# EAGLE board RGB_Station_v11_pannel (EAGLE 7.7.0), part 1 of 2
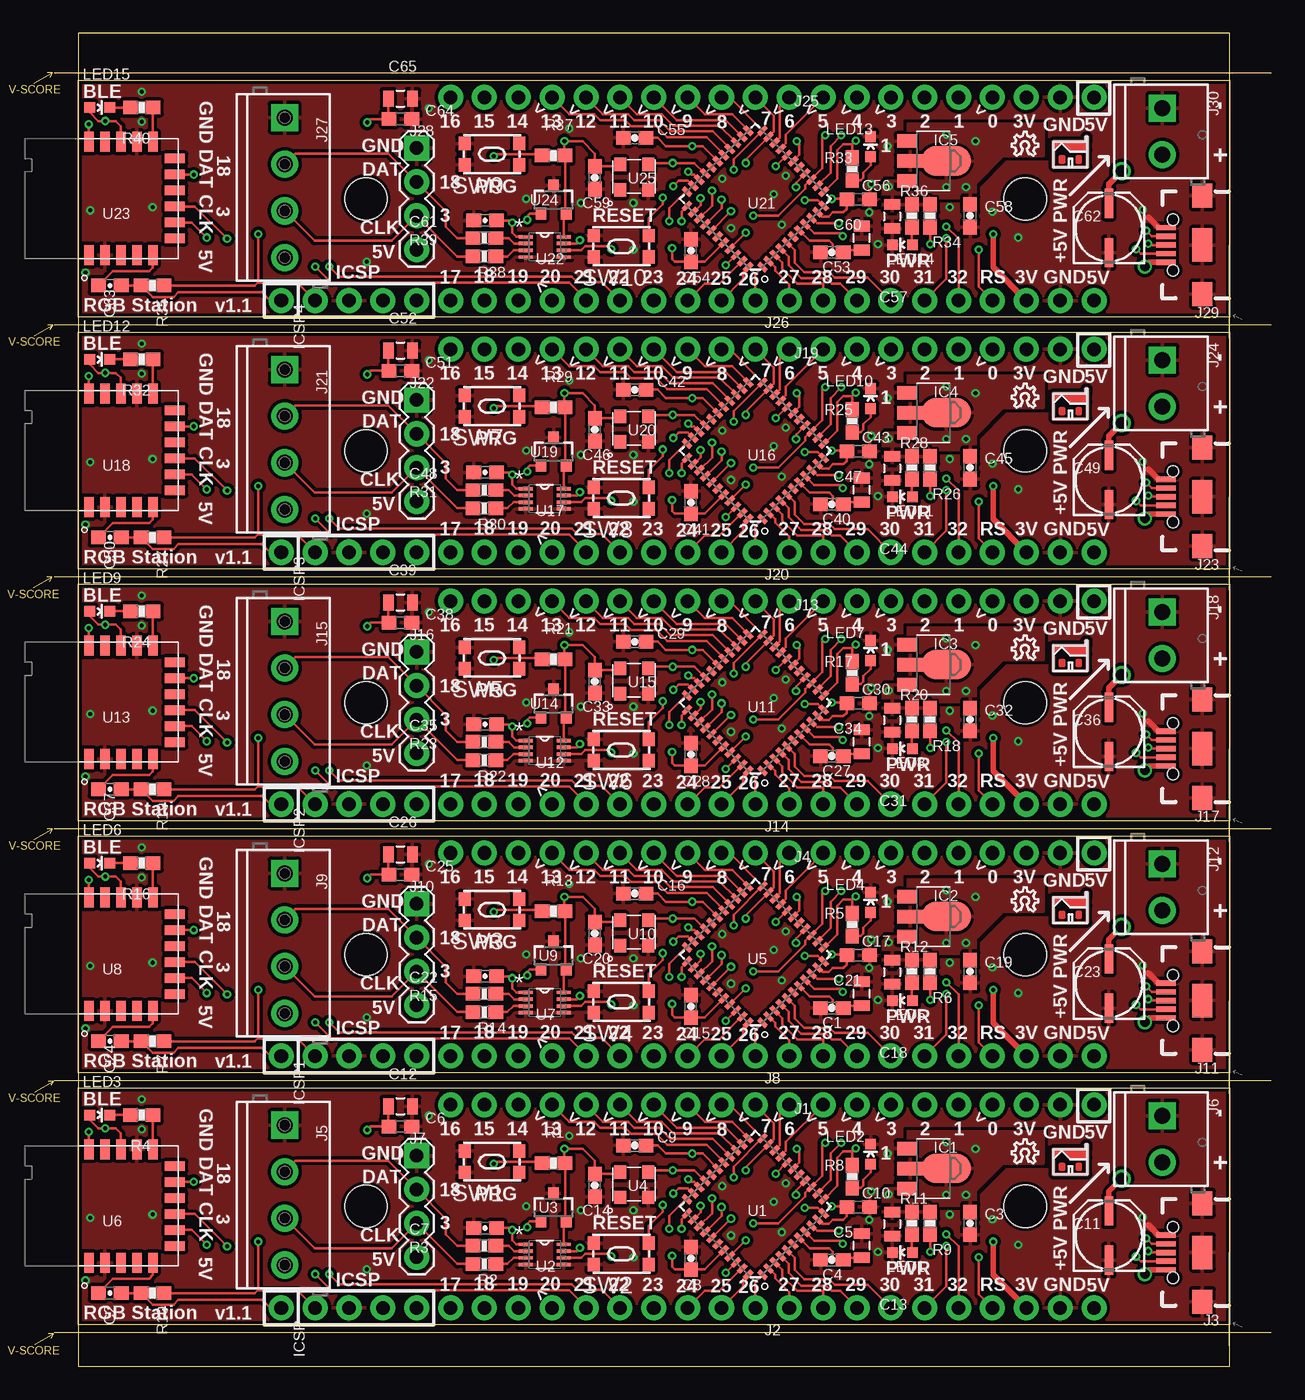
[diagram p0: board, top side]
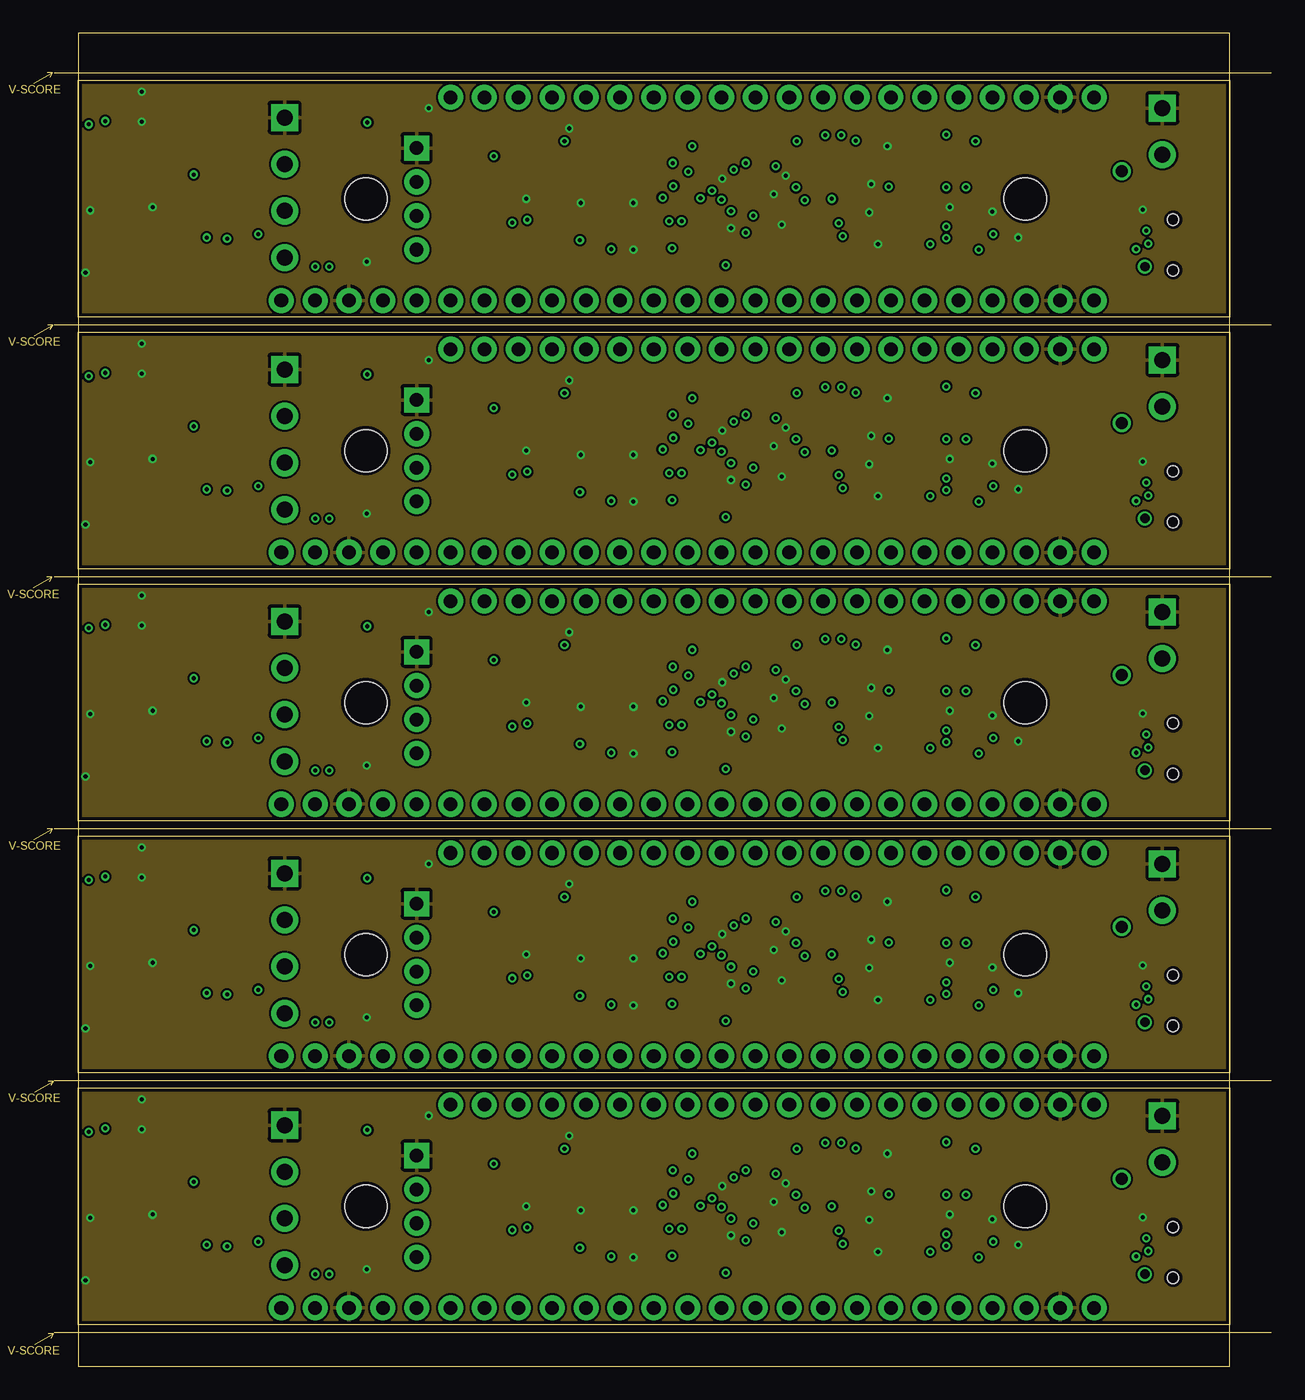
[diagram p1: board, inner layer Route2]
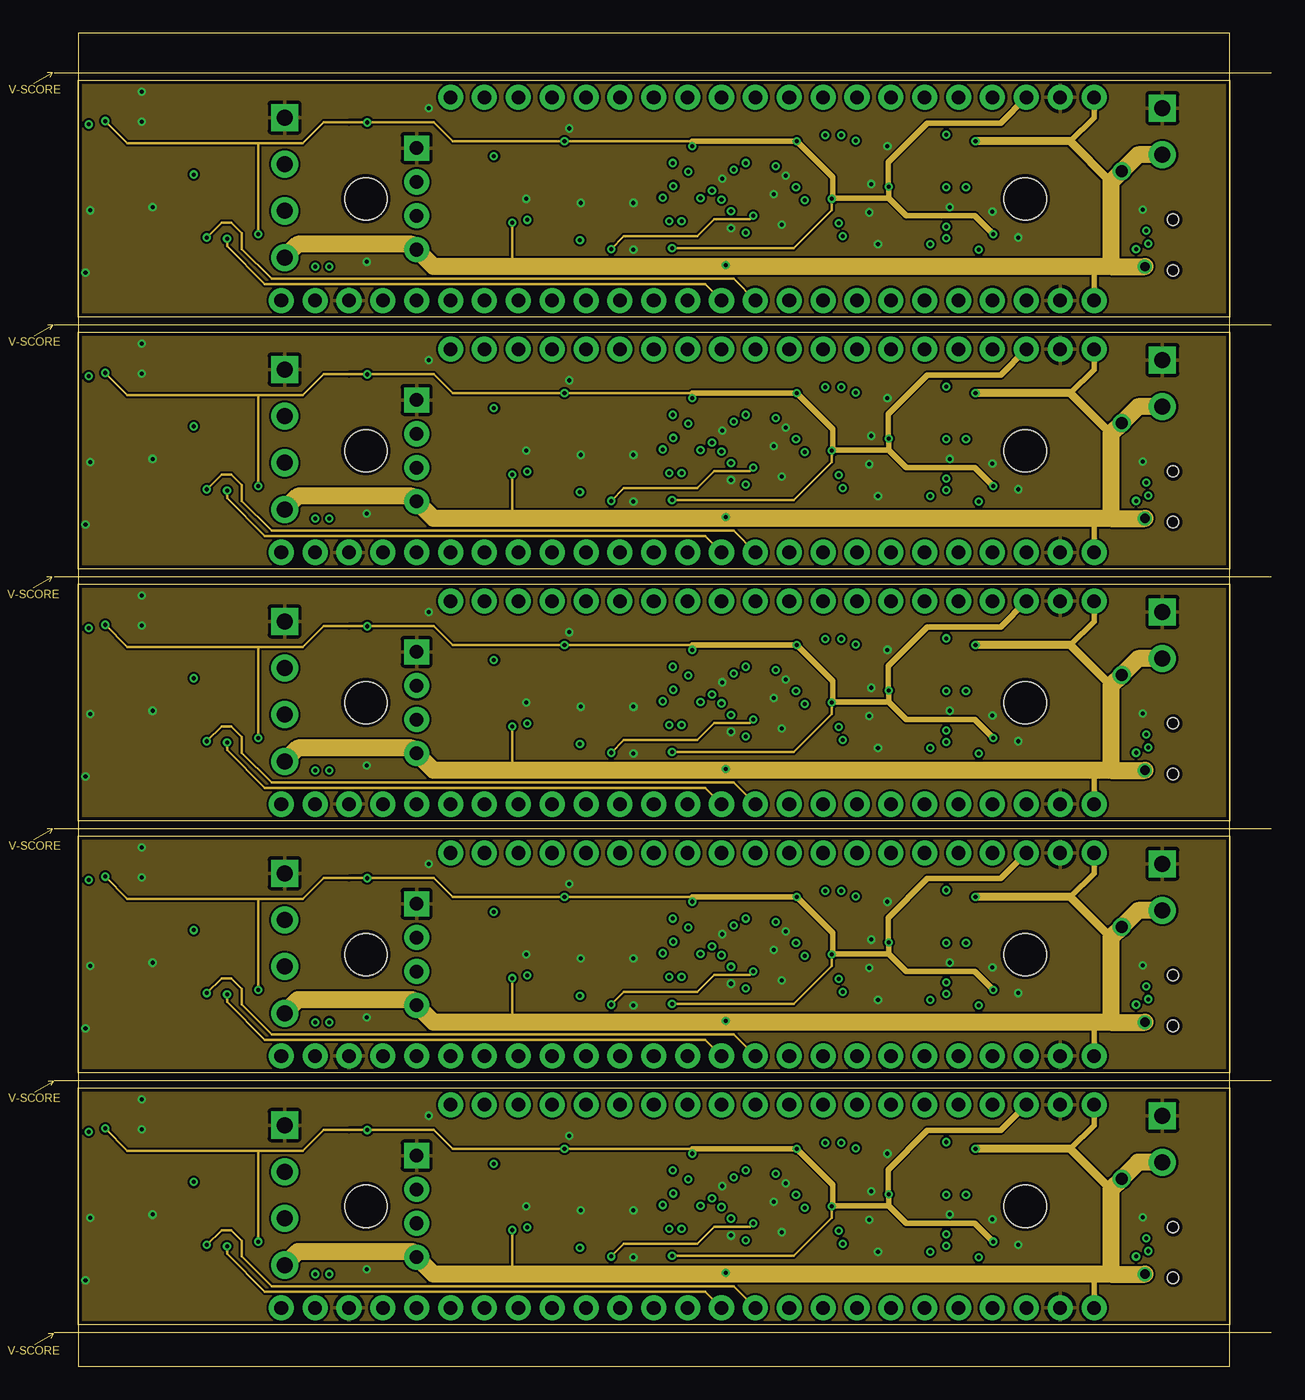
[diagram p2: board, inner layer Route15]
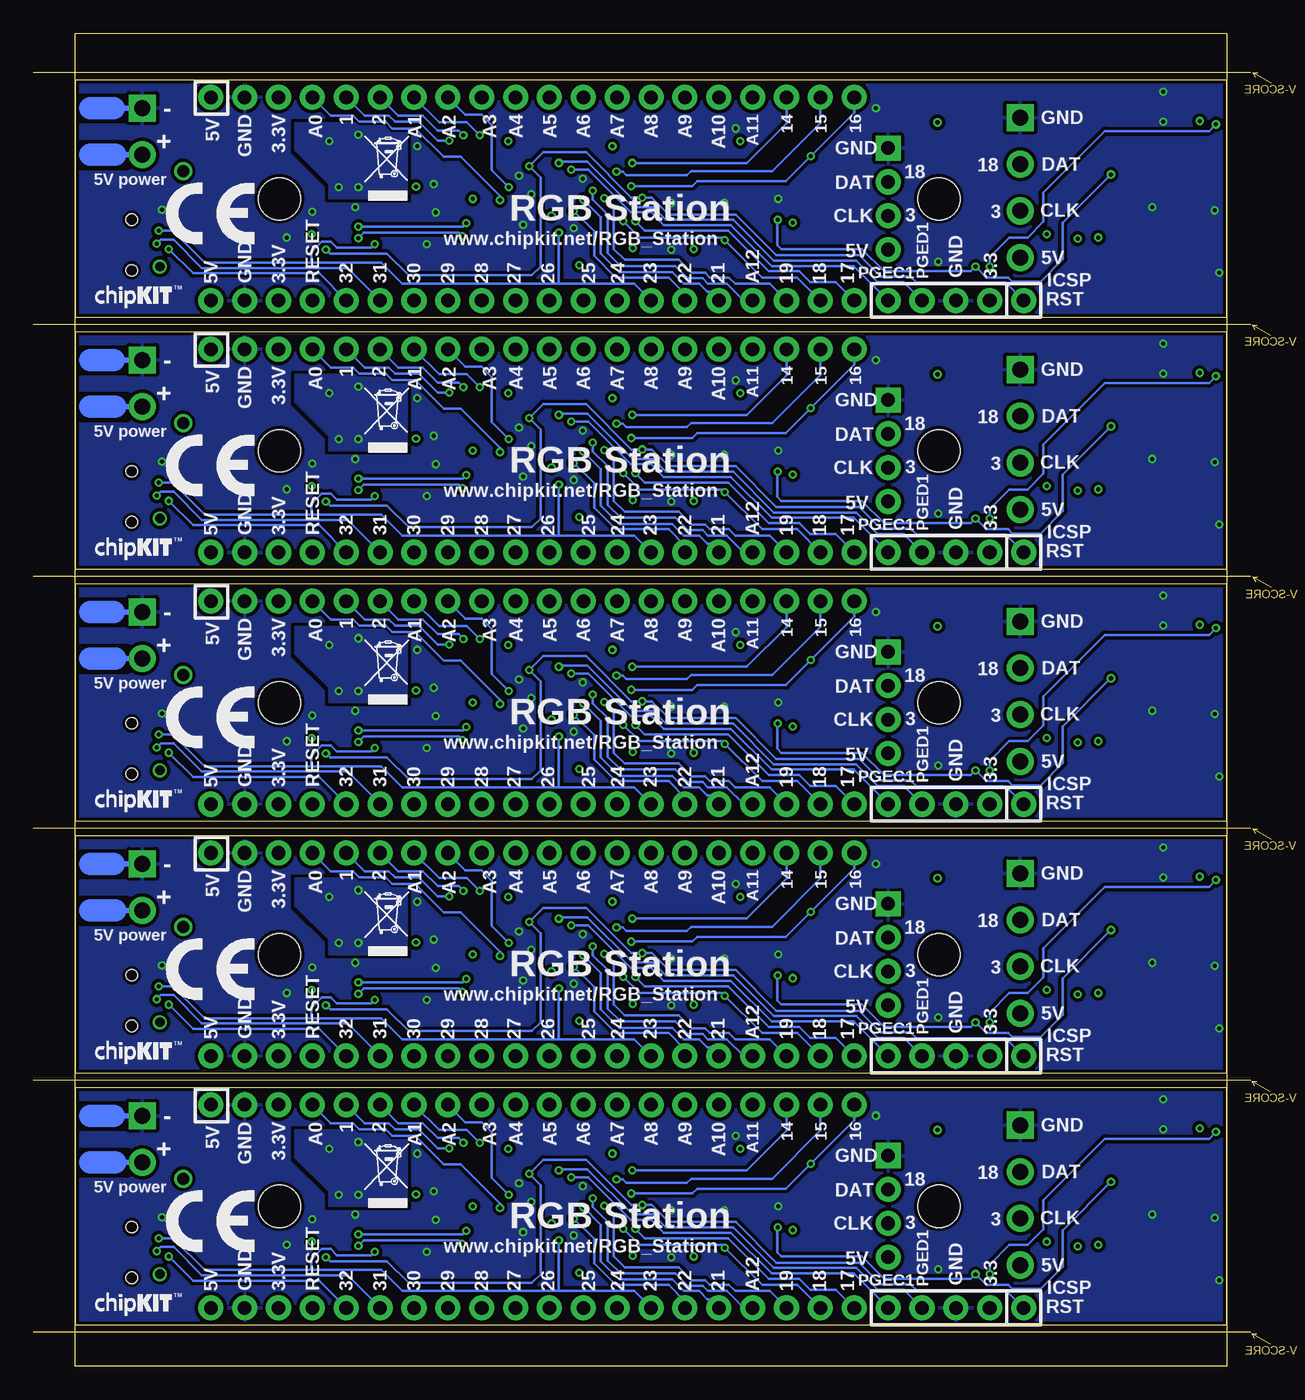
[diagram p3: board, bottom side, seen from below]

Size 92.86 x 100 mm. Coordinates in mm from the lower left corner, seen from the top.
Outline: 1.57,21.44 92.86,21.44
Outline: 1.57,40.34 92.86,40.34
Outline: 1.57,59.23 92.86,59.23
Outline: 1.57,78.13 92.86,78.13
Outline: 1.57,97.03 92.86,97.03
Outline: 1.57,2.54 92.86,2.54
Outline: 0.03,96.24 1.42,97.03
Outline: 1.42,97.03 1.04,97.03
Outline: 1.42,97.03 1.22,96.7
Outline: 0.05,77.32 1.45,78.11
Outline: 1.45,78.11 1.07,78.11
Outline: 1.45,78.11 1.24,77.78
Outline: 0,58.42 1.4,59.21
Outline: 1.4,59.21 1.02,59.21
Outline: 1.4,59.21 1.19,58.88
Outline: 0.03,39.52 1.42,40.31
Outline: 1.42,40.31 1.04,40.31
Outline: 1.42,40.31 1.22,39.98
Outline: 0.1,20.6 1.5,21.39
Outline: 1.5,21.39 1.12,21.39
Outline: 1.5,21.39 1.3,21.06
Outline: 0.1,1.63 1.5,2.41
Outline: 1.5,2.41 1.12,2.41
Outline: 1.5,2.41 1.3,2.08
Outline: 3.35,20.88 89.71,20.88 89.71,3.1 3.35,3.1 3.35,20.88
Outline: 3.35,0 89.71,0 89.71,100 3.35,100 3.35,0
Outline: 3.35,39.78 89.71,39.78 89.71,22 3.35,22 3.35,39.78
Outline: 3.35,58.67 89.71,58.67 89.71,40.89 3.35,40.89 3.35,58.67
Outline: 3.35,77.57 89.71,77.57 89.71,59.79 3.35,59.79 3.35,77.57
Outline: 3.35,96.47 89.71,96.47 89.71,78.69 3.35,78.69 3.35,96.47
Copper layers (1*2*15*16): Top 0.035mm / dielectric 1.5mm / Route2 0.035mm / dielectric 0.15mm / Route15 0.035mm / dielectric 0.2mm / Bottom 0.035mm
Design rules "Fusion_eagle_rule_v1.1 *": minimum track width 6mil, minimum drill 12mil, track to track 6mil, track to pad 6mil, pad to pad 6mil, via to via 6mil, smd to smd 0mil, copper to edge 10mil, drill to drill 10mil, minimum pad ring 10mil, minimum via ring 6mil, stop-mask expansion 2mil, vias tented up to drill 100mil, thermal gap 10mil
Holes 3.17 mm at 24.94,11.99 74.4,11.99 24.94,30.89 74.4,30.89 24.94,49.78 74.4,49.78 24.94,68.68 74.4,68.68 24.94,87.58 74.4,87.58
bRestrict: area 85.8,14.4 to 89.8,16.2; area 85.9,17.9 to 89.8,19.7; area 85.8,33.3 to 89.8,35.1; area 85.9,36.8 to 89.8,38.6; area 85.8,52.2 to 89.8,53.9; area 85.9,55.7 to 89.8,57.5; area 85.8,71.1 to 89.8,72.8; area 85.9,74.6 to 89.8,76.4; area 85.8,90 to 89.8,91.7; area 85.9,93.5 to 89.8,95.2

## Footprints (pad centres in the part's own frame; a part is rotated, then mirrored left to right if it is on the bottom)
0603-CAP = smd 1.1 x 1: 1 -0.85,0; 2 0.85,0
0805 = smd 0.8 x 1.2: 1 -0.9,0; 2 0.9,0
0603 = smd 1.1 x 1: 1 -0.85,0; 2 0.85,0
PANASONIC_C = smd 2.2 x 0.65: + 1.9,-0.2; - -1.8,-0.2
SOT89 = smd 1 x 1.5: 1 -1.499,-1.981; 3 1.499,-1.981 | smd 1 x 2: 2 0,-1.727 | smd 2.2 x 3.7: 2@1 0,0.94
1X05_NOSILK = drill 1.016 pad 1.88: 1 0,0; 2 2.54,0; 3 5.08,0; 4 7.62,0; 5 10.16,0
1X20_NO_PIN1 = drill 1.016 pad 1.88: 1 -24.13,0; 2 -21.59,0; 3 -19.05,0; 4 -16.51,0; 5 -13.97,0; 6 -11.43,0; 7 -8.89,0; 8 -6.35,0; 9 -3.81,0; 10 -1.27,0; 11 1.27,0; 12 3.81,0; 13 6.35,0; 14 8.89,0; 15 11.43,0; 16 13.97,0; 17 16.51,0; 18 19.05,0; 19 21.59,0; 20 24.13,0
USB-B-MICRO-SMD = smd 1.45 x 0.4: D+ 2.725,0; D- 2.725,0.65; GND 2.725,-1.3; ID 2.725,-0.65; VBUS 2.725,1.3 | smd 1.5 x 1.8: SHIELD1 0,3.685; SHIELD2 0,-3.685 | smd 1.5 x 2.5: SHIELD3 0,0 | hole 0.85: 2.2,1.9; 2.2,-1.9
SCREWTERMINAL-3.5MM-4@1 = drill 1.2 pad 2.032 square: 1 0,0 | drill 1.2 pad 2.032: 2 3.5,0; 3 7,0; 4 10.5,0
SCREWTERMINAL-3.5MM-2 = drill 1.2 pad 2.032 square: 1 0,0 | drill 1.2 pad 2.032: 2 3.5,0
1X04 = drill 1.016 pad 1.88 square: 1 0,0 | drill 1.016 pad 1.88: 2 2.54,0; 3 5.08,0; 4 7.62,0
LED-0603 = smd 0.8 x 0.8: A 0,-0.75; C 0,0.75
0603-RES = smd 1.1 x 1: 1 -0.85,0; 2 0.85,0
KMR2_SWITCH = smd 0.9 x 1: P1 -2.05,0.8; P2 -2.05,-0.8; P3 2.05,-0.8; P4 2.05,0.8
QFN-44-8X8-NOPAD = smd 0.8 x 0.35: 1 -4,3.25; 2 -4,2.6; 3 -4,1.95; 4 -4,1.3; 5 -4,0.65; 6 -4,0; 7 -4,-0.65; 8 -4,-1.3; 9 -4,-1.95; 10 -4,-2.6; 11 -4,-3.25; 23 4,-3.25; 24 4,-2.6; 25 4,-1.95; 26 4,-1.3; 27 4,-0.65; 28 4,0; 29 4,0.65; 30 4,1.3; 31 4,1.95; 32 4,2.6; 33 4,3.25 | smd 0.35 x 0.8: 12 -3.25,-4; 13 -2.6,-4; 14 -1.95,-4; 15 -1.3,-4; 16 -0.65,-4; 17 0,-4; 18 0.65,-4; 19 1.3,-4; 20 1.95,-4; 21 2.6,-4; 22 3.25,-4; 34 3.25,4; 35 2.6,4; 36 1.95,4; 37 1.3,4; 38 0.65,4; 39 0,4; 40 -0.65,4; 41 -1.3,4; 42 -1.95,4; 43 -2.6,4; 44 -3.25,4
VSSOP8 = smd 1.067 x 0.254: 1 -1.422,0.762; 2 -1.422,0.254; 3 -1.422,-0.254; 4 -1.422,-0.762; 5 1.422,-0.762; 6 1.422,-0.254; 7 1.422,0.254; 8 1.422,0.762
SOT23-3 = smd 0.8 x 0.9: 1 -0.95,-1; 2 0.95,-1; 3 0,1.1
CDFN-4_3.2X2.5 = smd 1 x 0.9: P1 -0.95,1.05; P2 -0.95,-1.05; P3 0.95,-1.05; P4 0.95,1.05
RN4871 = smd 1.5 x 0.7: 1 0.25,6.7; 2 0.25,5.5; 3 0.25,4.3; 4 0.25,3.1; 5 0.25,1.9; 12 8.75,1.9; 13 8.75,3.1; 14 8.75,4.3; 15 8.75,5.5; 16 8.75,6.7 | smd 0.7 x 1.5: 6 1.5,0.25; 7 2.7,0.25; 8 3.9,0.25; 9 5.1,0.25; 10 6.3,0.25; 11 7.5,0.25

## Placement (x,y rotation side)
C1  0.1uF  [0603-CAP]  59.89,26.87 180 top
C2  .1uF  [0603-CAP]  5.74,5.49 0 top
C3  1uF  [0603-CAP]  70.26,10.72 270 top
C4  0.1uF  [0603-CAP]  59.89,7.98 180 top
C5  10uF  [0805]  62.13,9.04 90 top
C6  0.1uF  [0603]  27.53,17.98 0 top
C7  .1uF  [0603-CAP]  33.88,10.36 0 top
C8  0.1uF  [0603-CAP]  49.32,8.1 90 top
C9  0.1uF  [0603-CAP]  45.11,16.56 180 top
C10  0.1uF  [0603]  61.87,11.94 0 top
C11  100uF  [PANASONIC_C]  80.47,9.75 90 top
C12  10uF  [0805]  27.53,19.51 0 top
C13  10uF  [0805]  64.41,10.67 270 top
C14  .1uF  [0603-CAP]  42.11,13.56 90 top
C15  0.1uF  [0603-CAP]  49.32,27 90 top
C16  0.1uF  [0603-CAP]  45.11,35.46 180 top
C17  0.1uF  [0603]  61.87,30.84 0 top
C18  10uF  [0805]  64.41,29.57 270 top
C19  1uF  [0603-CAP]  70.26,29.62 270 top
C20  .1uF  [0603-CAP]  42.11,32.46 90 top
C21  10uF  [0805]  62.13,27.94 90 top
C22  .1uF  [0603-CAP]  33.88,29.26 0 top
C23  100uF  [PANASONIC_C]  80.47,28.65 90 top
C24  .1uF  [0603-CAP]  5.74,24.38 0 top
C25  0.1uF  [0603]  27.53,36.88 0 top
C26  10uF  [0805]  27.53,38.4 0 top
C27  0.1uF  [0603-CAP]  59.89,45.77 180 top
C28  0.1uF  [0603-CAP]  49.32,45.89 90 top
C29  0.1uF  [0603-CAP]  45.11,54.36 180 top
C30  0.1uF  [0603]  61.87,49.73 0 top
C31  10uF  [0805]  64.41,48.46 270 top
C32  1uF  [0603-CAP]  70.26,48.51 270 top
C33  .1uF  [0603-CAP]  42.11,51.36 90 top
C34  10uF  [0805]  62.13,46.84 90 top
C35  .1uF  [0603-CAP]  33.88,48.16 0 top
C36  100uF  [PANASONIC_C]  80.47,47.55 90 top
C37  .1uF  [0603-CAP]  5.74,43.28 0 top
C38  0.1uF  [0603]  27.53,55.78 0 top
C39  10uF  [0805]  27.53,57.3 0 top
C40  0.1uF  [0603-CAP]  59.89,64.67 180 top
C41  0.1uF  [0603-CAP]  49.32,64.79 90 top
C42  0.1uF  [0603-CAP]  45.11,73.25 180 top
C43  0.1uF  [0603]  61.87,68.63 0 top
C44  10uF  [0805]  64.41,67.36 270 top
C45  1uF  [0603-CAP]  70.26,67.41 270 top
C46  .1uF  [0603-CAP]  42.11,70.26 90 top
C47  10uF  [0805]  62.13,65.74 90 top
C48  .1uF  [0603-CAP]  33.88,67.06 0 top
C49  100uF  [PANASONIC_C]  80.47,66.45 90 top
C50  .1uF  [0603-CAP]  5.74,62.18 0 top
C51  0.1uF  [0603]  27.53,74.68 0 top
C52  10uF  [0805]  27.53,76.2 0 top
C53  0.1uF  [0603-CAP]  59.89,83.57 180 top
C54  0.1uF  [0603-CAP]  49.32,83.69 90 top
C55  0.1uF  [0603-CAP]  45.11,92.15 180 top
C56  0.1uF  [0603]  61.87,87.53 0 top
C57  10uF  [0805]  64.41,86.26 270 top
C58  1uF  [0603-CAP]  70.26,86.31 270 top
C59  .1uF  [0603-CAP]  42.11,89.15 90 top
C60  10uF  [0805]  62.13,84.63 90 top
C61  .1uF  [0603-CAP]  33.88,85.95 0 top
C62  100uF  [PANASONIC_C]  80.47,85.34 90 top
C63  .1uF  [0603-CAP]  5.74,81.08 0 top
C64  0.1uF  [0603]  27.53,93.57 0 top
C65  10uF  [0805]  27.53,95.1 0 top
IC1  MCP1702T-3302E/MB  [SOT89]  67.51,14.83 270 top
IC2  MCP1702T-3302E/MB  [SOT89]  67.51,33.73 270 top
IC3  MCP1702T-3302E/MB  [SOT89]  67.51,52.63 270 top
IC4  MCP1702T-3302E/MB  [SOT89]  67.51,71.53 270 top
IC5  MCP1702T-3302E/MB  [SOT89]  67.51,90.42 270 top
ICSP  J3  [1X05_NOSILK]  18.59,4.37 0 top
ICSP1  J3  [1X05_NOSILK]  18.59,23.27 0 top
ICSP2  J3  [1X05_NOSILK]  18.59,42.16 0 top
ICSP3  J3  [1X05_NOSILK]  18.59,61.06 0 top
ICSP4  J3  [1X05_NOSILK]  18.59,79.96 0 top
J1  M20  [1X20_NO_PIN1]  55.42,19.61 180 top
J2  M20  [1X20_NO_PIN1]  55.42,4.37 0 top
J3  USB_MICRO  [USB-B-MICRO-SMD]  87.68,8.53 180 top
J4  M20  [1X20_NO_PIN1]  55.42,38.51 180 top
J5  [SCREWTERMINAL-3.5MM-4@1]  18.85,18.08 270 top
J6  [SCREWTERMINAL-3.5MM-2]  84.68,18.8 270 top
J7  [1X04]  28.75,15.8 270 top
J8  M20  [1X20_NO_PIN1]  55.42,23.27 0 top
J9  [SCREWTERMINAL-3.5MM-4@1]  18.85,36.98 270 top
J10  [1X04]  28.75,34.7 270 top
J11  USB_MICRO  [USB-B-MICRO-SMD]  87.68,27.43 180 top
J12  [SCREWTERMINAL-3.5MM-2]  84.68,37.69 270 top
J13  M20  [1X20_NO_PIN1]  55.42,57.4 180 top
J14  M20  [1X20_NO_PIN1]  55.42,42.16 0 top
J15  [SCREWTERMINAL-3.5MM-4@1]  18.85,55.88 270 top
J16  [1X04]  28.75,53.59 270 top
J17  USB_MICRO  [USB-B-MICRO-SMD]  87.68,46.33 180 top
J18  [SCREWTERMINAL-3.5MM-2]  84.68,56.59 270 top
J19  M20  [1X20_NO_PIN1]  55.42,76.3 180 top
J20  M20  [1X20_NO_PIN1]  55.42,61.06 0 top
J21  [SCREWTERMINAL-3.5MM-4@1]  18.85,74.78 270 top
J22  [1X04]  28.75,72.49 270 top
J23  USB_MICRO  [USB-B-MICRO-SMD]  87.68,65.23 180 top
J24  [SCREWTERMINAL-3.5MM-2]  84.68,75.49 270 top
J25  M20  [1X20_NO_PIN1]  55.42,95.2 180 top
J26  M20  [1X20_NO_PIN1]  55.42,79.96 0 top
J27  [SCREWTERMINAL-3.5MM-4@1]  18.85,93.68 270 top
J28  [1X04]  28.75,91.39 270 top
J29  USB_MICRO  [USB-B-MICRO-SMD]  87.68,84.12 180 top
J30  [SCREWTERMINAL-3.5MM-2]  84.68,94.39 270 top
LED1  RED  [LED-0603]  65.18,8.53 90 top
LED2  GREEN  [LED-0603]  62.79,15.9 0 top
LED3  Blue  [LED-0603]  4.98,18.85 270 top
LED4  GREEN  [LED-0603]  62.79,34.8 0 top
LED5  RED  [LED-0603]  65.18,27.43 90 top
LED6  Blue  [LED-0603]  4.98,37.74 270 top
LED7  GREEN  [LED-0603]  62.79,53.7 0 top
LED8  RED  [LED-0603]  65.18,46.33 90 top
LED9  Blue  [LED-0603]  4.98,56.64 270 top
LED10  GREEN  [LED-0603]  62.79,72.59 0 top
LED11  RED  [LED-0603]  65.18,65.23 90 top
LED12  Blue  [LED-0603]  4.98,75.54 270 top
LED13  GREEN  [LED-0603]  62.79,91.49 0 top
LED14  RED  [LED-0603]  65.18,84.12 90 top
LED15  Blue  [LED-0603]  4.98,94.44 270 top
LOGO1  OSHW_LOGO_8MILX0070-NT  [OSHW_8X70_NOTEXT]  73.38,15.23 0 top
LOGO2  OSHW_LOGO_8MILX0070-NT  [OSHW_8X70_NOTEXT]  73.38,34.13 0 top
LOGO3  OSHW_LOGO_8MILX0070-NT  [OSHW_8X70_NOTEXT]  73.38,53.03 0 top
LOGO4  OSHW_LOGO_8MILX0070-NT  [OSHW_8X70_NOTEXT]  73.38,71.93 0 top
LOGO5  OSHW_LOGO_8MILX0070-NT  [OSHW_8X70_NOTEXT]  73.38,90.82 0 top
R1  10K  [0603-RES]  39.01,15.24 180 top
R2  100  [0603-RES]  33.83,7.67 180 top
R3  100  [0603-RES]  33.83,9.04 0 top
R4  8.2K  [0603-RES]  8.13,18.85 0 top
R5  8.2K  [0603-RES]  61.42,33.12 270 top
R6  10K  [0603-RES]  67.26,29.62 90 top
R7  10K  [0603-RES]  8.94,24.38 180 top
R8  8.2K  [0603-RES]  61.42,14.22 270 top
R9  10K  [0603-RES]  67.26,10.72 90 top
R10  10K  [0603-RES]  8.94,5.49 180 top
R11  8.2K  [0603-RES]  65.89,10.72 90 top
R12  8.2K  [0603-RES]  65.89,29.62 90 top
R13  10K  [0603-RES]  39.01,34.14 180 top
R14  100  [0603-RES]  33.83,26.57 180 top
R15  100  [0603-RES]  33.83,27.94 0 top
R16  8.2K  [0603-RES]  8.13,37.74 0 top
R17  8.2K  [0603-RES]  61.42,52.02 270 top
R18  10K  [0603-RES]  67.26,48.51 90 top
R19  10K  [0603-RES]  8.94,43.28 180 top
R20  8.2K  [0603-RES]  65.89,48.51 90 top
R21  10K  [0603-RES]  39.01,53.04 180 top
R22  100  [0603-RES]  33.83,45.47 180 top
R23  100  [0603-RES]  33.83,46.84 0 top
R24  8.2K  [0603-RES]  8.13,56.64 0 top
R25  8.2K  [0603-RES]  61.42,70.92 270 top
R26  10K  [0603-RES]  67.26,67.41 90 top
R27  10K  [0603-RES]  8.94,62.18 180 top
R28  8.2K  [0603-RES]  65.89,67.41 90 top
R29  10K  [0603-RES]  39.01,71.93 180 top
R30  100  [0603-RES]  33.83,64.36 180 top
R31  100  [0603-RES]  33.83,65.74 0 top
R32  8.2K  [0603-RES]  8.13,75.54 0 top
R33  8.2K  [0603-RES]  61.42,89.81 270 top
R34  10K  [0603-RES]  67.26,86.31 90 top
R35  10K  [0603-RES]  8.94,81.08 180 top
R36  8.2K  [0603-RES]  65.89,86.31 90 top
R37  10K  [0603-RES]  39.01,90.83 180 top
R38  100  [0603-RES]  33.83,83.26 180 top
R39  100  [0603-RES]  33.83,84.63 0 top
R40  8.2K  [0603-RES]  8.13,94.44 0 top
SW1  KMR2_SWITCH  [KMR2_SWITCH]  34.39,15.34 0 top
SW2  KMR2_SWITCH  [KMR2_SWITCH]  44.09,8.43 0 top
SW3  KMR2_SWITCH  [KMR2_SWITCH]  34.39,34.24 0 top
SW4  KMR2_SWITCH  [KMR2_SWITCH]  44.09,27.33 0 top
SW5  KMR2_SWITCH  [KMR2_SWITCH]  34.39,53.14 0 top
SW6  KMR2_SWITCH  [KMR2_SWITCH]  44.09,46.23 0 top
SW7  KMR2_SWITCH  [KMR2_SWITCH]  34.39,72.03 0 top
SW8  KMR2_SWITCH  [KMR2_SWITCH]  44.09,65.13 0 top
SW9  KMR2_SWITCH  [KMR2_SWITCH]  34.39,90.93 0 top
SW10  KMR2_SWITCH  [KMR2_SWITCH]  44.09,84.02 0 top
U1  PIC32MX270F256D_44VTLA_44  [QFN-44-8X8-NOPAD]  54.15,11.99 135 top
U2  74LVC2T45  [VSSOP8]  38.35,8.38 0 top
U3  MCP121T-315E/TT  [SOT23-3]  39.01,11.89 0 top
U4  DSC6111CI1A-008.0000  [CDFN-4_3.2X2.5]  45.06,13.61 90 top
U5  PIC32MX270F256D_44VTLA_44  [QFN-44-8X8-NOPAD]  54.15,30.89 135 top
U6  RN4871  [RN4871]  10.87,7.52 90 top
U7  74LVC2T45  [VSSOP8]  38.35,27.28 0 top
U8  RN4871  [RN4871]  10.87,26.42 90 top
U9  MCP121T-315E/TT  [SOT23-3]  39.01,30.78 0 top
U10  DSC6111CI1A-008.0000  [CDFN-4_3.2X2.5]  45.06,32.51 90 top
U11  PIC32MX270F256D_44VTLA_44  [QFN-44-8X8-NOPAD]  54.15,49.78 135 top
U12  74LVC2T45  [VSSOP8]  38.35,46.18 0 top
U13  RN4871  [RN4871]  10.87,45.31 90 top
U14  MCP121T-315E/TT  [SOT23-3]  39.01,49.68 0 top
U15  DSC6111CI1A-008.0000  [CDFN-4_3.2X2.5]  45.06,51.41 90 top
U16  PIC32MX270F256D_44VTLA_44  [QFN-44-8X8-NOPAD]  54.15,68.68 135 top
U17  74LVC2T45  [VSSOP8]  38.35,65.07 0 top
U18  RN4871  [RN4871]  10.87,64.21 90 top
U19  MCP121T-315E/TT  [SOT23-3]  39.01,68.58 0 top
U20  DSC6111CI1A-008.0000  [CDFN-4_3.2X2.5]  45.06,70.31 90 top
U21  PIC32MX270F256D_44VTLA_44  [QFN-44-8X8-NOPAD]  54.15,87.58 135 top
U22  74LVC2T45  [VSSOP8]  38.35,83.97 0 top
U23  RN4871  [RN4871]  10.87,83.11 90 top
U24  MCP121T-315E/TT  [SOT23-3]  39.01,87.48 0 top
U25  DSC6111CI1A-008.0000  [CDFN-4_3.2X2.5]  45.06,89.2 90 top
U$1  CE_MARK5MM  [CE_5MM]  79.58,29.83 0 bottom
U$2  CE_MARK5MM  [CE_5MM]  79.58,10.93 0 bottom
U$3  ROSH_GARBAGE  [ROHS_GARBAGE_5MM]  68.02,11.88 0 bottom
U$4  CHIPKIT2MM  [CHIPKIT_2MM]  88.34,3.74 0 bottom
U$5  SCHMALZHAUSSCHMALZHAUS_SMALL  [SCHMALZHAUS_SMALL]  77.77,14.38 0 top
U$6  ROSH_GARBAGE  [ROHS_GARBAGE_5MM]  68.02,30.77 0 bottom
U$7  CHIPKIT2MM  [CHIPKIT_2MM]  88.34,22.64 0 bottom
U$8  SCHMALZHAUSSCHMALZHAUS_SMALL  [SCHMALZHAUS_SMALL]  77.77,33.27 0 top
U$9  CE_MARK5MM  [CE_5MM]  79.58,48.73 0 bottom
U$10  ROSH_GARBAGE  [ROHS_GARBAGE_5MM]  68.02,49.67 0 bottom
U$11  CHIPKIT2MM  [CHIPKIT_2MM]  88.34,41.54 0 bottom
U$12  SCHMALZHAUSSCHMALZHAUS_SMALL  [SCHMALZHAUS_SMALL]  77.77,52.17 0 top
U$13  CE_MARK5MM  [CE_5MM]  79.58,67.62 0 bottom
U$14  ROSH_GARBAGE  [ROHS_GARBAGE_5MM]  68.02,68.57 0 bottom
U$15  CHIPKIT2MM  [CHIPKIT_2MM]  88.34,60.44 0 bottom
U$16  SCHMALZHAUSSCHMALZHAUS_SMALL  [SCHMALZHAUS_SMALL]  77.77,71.07 0 top
U$17  CE_MARK5MM  [CE_5MM]  79.58,86.52 0 bottom
U$18  ROSH_GARBAGE  [ROHS_GARBAGE_5MM]  68.02,87.47 0 bottom
U$19  CHIPKIT2MM  [CHIPKIT_2MM]  88.34,79.33 0 bottom
U$20  SCHMALZHAUSSCHMALZHAUS_SMALL  [SCHMALZHAUS_SMALL]  77.77,89.97 0 top

## Library data of the parts
C1 C3 C4 C8 C9 C14-C16 C19 C20 C27-C29 C32 C33 C40-C42 C45 C46 C53-C55 C58 C59 LED1-LED15 R1 R4-R13 R16-R21 R24-R29 R32-R37 R40 = SparkFun
C2 C7 C11 C22-C24 C35-C37 C48-C50 C61-C63 = SparkFun-Capacitors
C5 C12 C21 C26 C34 C39 C47 C52 C60 C65 ICSP ICSP1-ICSP4 J1 J2 J4 J8 J13 J14 J19 J20 J25 J26 U1 U5 U11 U16 U21 U$5 U$8 U$12 U$16 U$20 = SchmalzHaus
C6 C10 C13 C17 C18 C25 C30 C31 C38 C43 C44 C51 C56 C57 C64 = SparkFun02-20-08
IC1-IC5 = linear
J3 J11 J17 J23 J29 = SparkFun-Connectors; PROD_ID: CONN-11752
J5 J9 J15 J21 J27 = SparkFun-Connectors; PROD_ID: 2xCONN-08399; SF_ID: 2xPRT-08084
J6 J12 J18 J24 J30 = SparkFun-Connectors; PROD_ID: CONN-08399
J7 J10 J16 J22 J28 = SparkFun-Connectors; PROD_ID: CONN-09696
LOGO1-LOGO5 = OSHW
R2 R3 R14 R15 R22 R23 R30 R31 R38 R39 = SparkFun-Resistors
SW1-SW10 = kmr2_switch
U2 U7 U12 U17 U22 = 74LVCH2T45DC
U3 U9 U14 U19 U24 = MCP1x2_ResetController
U4 U10 U15 U20 U25 = DSC61XX
U6 U8 U13 U18 U23 = RN4870-71
U$1-U$4 U$6 U$7 U$9-U$11 U$13-U$15 U$17-U$19 = SchmalzHausPublic

## Nets
3.3V: C6.1 C8.1 C9.1 C10.1 C12.1 C13.1 C14.2 IC1.3 ICSP.2 J1.3 J2.18 LED3.A R1.1 R9.2 R10.1 R11.2 U1.10 U1.17 U1.28 U1.40 U2.8 U3.2 U4.P4 U6.14
3.3V1: C15.1 C16.1 C17.1 C18.1 C20.2 C25.1 C26.1 IC2.3 ICSP1.2 J4.3 J8.18 LED6.A R6.2 R7.1 R12.2 R13.1 U5.10 U5.17 U5.28 U5.40 U7.8 U8.14 U9.2 U10.P4
3.3V2: C28.1 C29.1 C30.1 C31.1 C33.2 C38.1 C39.1 IC3.3 ICSP2.2 J13.3 J14.18 LED9.A R18.2 R19.1 R20.2 R21.1 U11.10 U11.17 U11.28 U11.40 U12.8 U13.14 U14.2 U15.P4
3.3V3: C41.1 C42.1 C43.1 C44.1 C46.2 C51.1 C52.1 IC4.3 ICSP3.2 J19.3 J20.18 LED12.A R26.2 R27.1 R28.2 R29.1 U16.10 U16.17 U16.28 U16.40 U17.8 U18.14 U19.2 U20.P4
3.3V4: C54.1 C55.1 C56.1 C57.1 C59.2 C64.1 C65.1 IC5.3 ICSP4.2 J25.3 J26.18 LED15.A R34.2 R35.1 R36.2 R37.1 U21.10 U21.17 U21.28 U21.40 U22.8 U23.14 U24.2 U25.P4
5V: C3.1 C7.2 C11.+ IC1.2 IC1.2@1 J1.1 J2.20 J3.VBUS J5.4 J6.2 J7.4 U1.42 U2.1
5V1: C19.1 C22.2 C23.+ IC2.2 IC2.2@1 J4.1 J8.20 J9.4 J10.4 J11.VBUS J12.2 U5.42 U7.1
5V2: C32.1 C35.2 C36.+ IC3.2 IC3.2@1 J13.1 J14.20 J15.4 J16.4 J17.VBUS J18.2 U11.42 U12.1
5V3: C45.1 C48.2 C49.+ IC4.2 IC4.2@1 J19.1 J20.20 J21.4 J22.4 J23.VBUS J24.2 U16.42 U17.1
5V4: C58.1 C61.2 C62.+ IC5.2 IC5.2@1 J25.1 J26.20 J27.4 J28.4 J29.VBUS J30.2 U21.42 U22.1
!MCLR!: C2.2 ICSP.1 J2.17 R10.2 SW2.P3 SW2.P4 U1.18
!MCLR!1: C24.2 ICSP1.1 J8.17 R7.2 SW4.P3 SW4.P4 U5.18
!MCLR!2: C37.2 ICSP2.1 J14.17 R19.2 SW6.P3 SW6.P4 U11.18
!MCLR!3: C50.2 ICSP3.1 J20.17 R27.2 SW8.P3 SW8.P4 U16.18
!MCLR!4: C63.2 ICSP4.1 J26.17 R35.2 SW10.P3 SW10.P4 U21.18
BT_MODE: J2.5 U1.37 U6.16
BT_MODE1: J8.5 U5.37 U8.16
BT_MODE2: J14.5 U11.37 U13.16
BT_MODE3: J20.5 U16.37 U18.16
BT_MODE4: J26.5 U21.37 U23.16
BT_RX: J2.10 U1.1 U6.7
BT_RX1: J8.10 U5.1 U8.7
BT_RX2: J14.10 U11.1 U13.7
BT_RX3: J20.10 U16.1 U18.7
BT_RX4: J26.10 U21.1 U23.7
BT_TX: J2.9 U1.44 U6.8
BT_TX1: J8.9 U5.44 U8.8
BT_TX2: J14.9 U11.44 U13.8
BT_TX3: J20.9 U16.44 U18.8
BT_TX4: J26.9 U21.44 U23.8
D+/RB1: J8.15 J11.D+ U5.8
D+/RB2: J14.15 J17.D+ U11.8
D+/RB3: J20.15 J23.D+ U16.8
D+/RB4: J26.15 J29.D+ U21.8
D+/RB10: J2.15 J3.D+ U1.8
D-/RB1: J8.16 J11.D- U5.9
D-/RB2: J14.16 J17.D- U11.9
D-/RB3: J20.16 J23.D- U16.9
D-/RB4: J26.16 J29.D- U21.9
D-/RB11: J2.16 J3.D- U1.9
GND: C3.2 C4.2 C5.2 C6.2 C7.1 C8.2 C9.2 C10.2 C11.- C12.2 C13.2 C14.1 IC1.1 ICSP.3 J1.2 J2.19 J3.GND J3.SHIELD1 J3.SHIELD2 J3.SHIELD3 J5.1 J6.1 J7.1 LED1.C LED2.C SW1.P1 SW1.P2 SW2.P1 SW2.P2 U1.6 U1.16 U1.29 U1.39 U2.4 U2.5 U3.3 U4.P2 U6.2 U6.13
GND1: C1.2 C15.2 C16.2 C17.2 C18.2 C19.2 C20.1 C21.2 C22.1 C23.- C25.2 C26.2 IC2.1 ICSP1.3 J4.2 J8.19 J9.1 J10.1 J11.GND J11.SHIELD1 J11.SHIELD2 J11.SHIELD3 J12.1 LED4.C LED5.C SW3.P1 SW3.P2 SW4.P1 SW4.P2 U5.6 U5.16 U5.29 U5.39 U7.4 U7.5 U8.2 U8.13 U9.3 U10.P2
GND2: C27.2 C28.2 C29.2 C30.2 C31.2 C32.2 C33.1 C34.2 C35.1 C36.- C38.2 C39.2 IC3.1 ICSP2.3 J13.2 J14.19 J15.1 J16.1 J17.GND J17.SHIELD1 J17.SHIELD2 J17.SHIELD3 J18.1 LED7.C LED8.C SW5.P1 SW5.P2 SW6.P1 SW6.P2 U11.6 U11.16 U11.29 U11.39 U12.4 U12.5 U13.2 U13.13 U14.3 U15.P2
GND3: C40.2 C41.2 C42.2 C43.2 C44.2 C45.2 C46.1 C47.2 C48.1 C49.- C51.2 C52.2 IC4.1 ICSP3.3 J19.2 J20.19 J21.1 J22.1 J23.GND J23.SHIELD1 J23.SHIELD2 J23.SHIELD3 J24.1 LED10.C LED11.C SW7.P1 SW7.P2 SW8.P1 SW8.P2 U16.6 U16.16 U16.29 U16.39 U17.4 U17.5 U18.2 U18.13 U19.3 U20.P2
GND4: C53.2 C54.2 C55.2 C56.2 C57.2 C58.2 C59.1 C60.2 C61.1 C62.- C64.2 C65.2 IC5.1 ICSP4.3 J25.2 J26.19 J27.1 J28.1 J29.GND J29.SHIELD1 J29.SHIELD2 J29.SHIELD3 J30.1 LED13.C LED14.C SW9.P1 SW9.P2 SW10.P1 SW10.P2 U21.6 U21.16 U21.29 U21.39 U22.4 U22.5 U23.2 U23.13 U24.3 U25.P2
LED_CLOCK: J1.7 U1.14 U2.6
LED_CLOCK1: J4.7 U5.14 U7.6
LED_CLOCK2: J13.7 U11.14 U12.6
LED_CLOCK3: J19.7 U16.14 U17.6
LED_CLOCK4: J25.7 U21.14 U22.6
LED_DATA: J2.2 U1.34 U2.7
LED_DATA1: J8.2 U5.34 U7.7
LED_DATA2: J14.2 U11.34 U12.7
LED_DATA3: J20.2 U16.34 U17.7
LED_DATA4: J26.2 U21.34 U22.7
N$1: R4.2 U6.12
N$2: J5.2 J7.2 R3.1
N$3: R3.2 U2.2
N$4: J5.3 J7.3 R2.2
N$5: LED3.C R4.1
N$6: LED1.A R11.1
N$7: LED5.A R12.1
N$8: C2.1 U6.5
N$9: J9.3 J10.3 R14.2
N$10: R14.1 U7.3
N$11: LED2.A R8.2
N$12: J9.2 J10.2 R15.1
N$13: R15.2 U7.2
N$14: C24.1 U8.5
N$15: LED4.A R5.2
N$16: R16.2 U8.12
N$17: LED6.C R16.1
N$18: LED8.A R20.1
N$19: J15.3 J16.3 R22.2
N$20: R22.1 U12.3
N$21: J15.2 J16.2 R23.1
N$22: R23.2 U12.2
N$23: R2.1 U2.3
N$24: C37.1 U13.5
N$25: LED7.A R17.2
N$26: R24.2 U13.12
N$27: LED9.C R24.1
N$28: LED11.A R28.1
N$29: J21.3 J22.3 R30.2
N$30: R30.1 U17.3
N$31: J21.2 J22.2 R31.1
N$32: R31.2 U17.2
N$33: C50.1 U18.5
N$34: LED10.A R25.2
N$35: R32.2 U18.12
N$36: LED12.C R32.1
N$37: LED14.A R36.1
N$38: J27.3 J28.3 R38.2
N$39: R38.1 U22.3
N$40: J27.2 J28.2 R39.1
N$41: R39.2 U22.2
N$42: C63.1 U23.5
N$43: LED13.A R33.2
N$44: R40.2 U23.12
N$45: LED15.C R40.1
RA0: J1.9 U1.19
RA1: J1.10 U1.20
RA2: J1.18 U1.30 U4.P3
RA3: J1.19 U1.31
RA4: J4.19 U5.31
RA5: J4.18 U5.30 U10.P3
RA6: J8.3 U5.35
RA7: J1.6 U1.13
RA8: J1.20 R1.2 SW1.P3 SW1.P4 U1.32
RA9: J2.3 U1.35
RA10: J1.5 R8.1 U1.12
RA11: J4.20 R13.2 SW3.P3 SW3.P4 U5.32
RA12: J4.5 R5.1 U5.12
RA13: J4.6 U5.13
RA14: J4.9 U5.19
RA15: J4.10 U5.20
RA16: J13.19 U11.31
RA17: J13.18 U11.30 U15.P3
RA18: J14.3 U11.35
RA19: J13.20 R21.2 SW5.P3 SW5.P4 U11.32
RA20: J13.5 R17.1 U11.12
RA21: J13.6 U11.13
RA22: J13.9 U11.19
RA23: J13.10 U11.20
RA24: J19.19 U16.31
RA25: J19.18 U16.30 U20.P3
RA26: J20.3 U16.35
RA27: J19.20 R29.2 SW7.P3 SW7.P4 U16.32
RA28: J19.5 R25.1 U16.12
RA29: J19.6 U16.13
RA30: J19.9 U16.19
RA31: J19.10 U16.20
RA32: J25.19 U21.31
RA33: J25.18 U21.30 U25.P3
RA34: J26.3 U21.35
RA35: J25.20 R37.2 SW9.P3 SW9.P4 U21.32
RA36: J25.5 R33.1 U21.12
RA37: J25.6 U21.13
RA38: J25.9 U21.19
RA39: J25.10 U21.20
RB0: ICSP.4 J1.11 U1.21
RB1: ICSP.5 J1.12 U1.22
RB2: J1.13 U1.23
RB3: J1.14 U1.24
RB4: J2.1 U1.33
RB5: J4.4 U5.11
RB6: J4.8 U5.15
RB7: J2.8 U1.43
RB8: ICSP1.5 J4.12 U5.22
RB9: ICSP1.4 J4.11 U5.21
RB10: J8.8 U5.43
RB11: J4.14 U5.24
RB12: J4.13 U5.23
RB13: J1.4 U1.11
RB14: J8.1 U5.33
RB15: J1.8 U1.15
RB16: J13.4 U11.11
RB17: J13.8 U11.15
RB18: ICSP2.5 J13.12 U11.22
RB19: ICSP2.4 J13.11 U11.21
RB20: J14.8 U11.43
RB21: J13.14 U11.24
RB22: J13.13 U11.23
RB23: J14.1 U11.33
RB24: J19.4 U16.11
RB25: J19.8 U16.15
RB26: ICSP3.5 J19.12 U16.22
RB27: ICSP3.4 J19.11 U16.21
RB28: J20.8 U16.43
RB29: J19.14 U16.24
RB30: J19.13 U16.23
RB31: J20.1 U16.33
RB32: J25.4 U21.11
RB33: J25.8 U21.15
RB34: ICSP4.5 J25.12 U21.22
RB35: ICSP4.4 J25.11 U21.21
RB36: J26.8 U21.43
RB37: J25.14 U21.24
RB38: J25.13 U21.23
RB39: J26.1 U21.33
RC0: J1.15 U1.25
RC1: J1.16 U1.26
RC2: J1.17 U1.27
RC3: J2.4 U1.36
RC4: J8.4 U5.36
RC5: J4.17 U5.27
RC6: J2.11 U1.2
RC7: J2.12 U1.3
RC8: J2.13 U1.4
RC9: J2.14 U1.5
RC10: J4.16 U5.26
RC11: J4.15 U5.25
RC12: J8.11 U5.2
RC13: J8.12 U5.3
RC14: J8.13 U5.4
RC15: J8.14 U5.5
RC16: J14.4 U11.36
RC17: J13.17 U11.27
RC18: J13.16 U11.26
RC19: J13.15 U11.25
RC20: J14.11 U11.2
RC21: J14.12 U11.3
RC22: J14.13 U11.4
RC23: J14.14 U11.5
RC24: J20.4 U16.36
RC25: J19.17 U16.27
RC26: J19.16 U16.26
RC27: J19.15 U16.25
RC28: J20.11 U16.2
RC29: J20.12 U16.3
RC30: J20.13 U16.4
RC31: J20.14 U16.5
RC32: J26.4 U21.36
RC33: J25.17 U21.27
RC34: J25.16 U21.26
RC35: J25.15 U21.25
RC36: J26.11 U21.2
RC37: J26.12 U21.3
RC38: J26.13 U21.4
RC39: J26.14 U21.5
RST_N: J2.6 U1.38 U3.1 U6.10
RST_N1: J8.6 U5.38 U8.10 U9.1
RST_N2: J14.6 U11.38 U13.10 U14.1
RST_N3: J20.6 U16.38 U18.10 U19.1
RST_N4: J26.6 U21.38 U23.10 U24.1
USBID/RB1: J8.7 J11.ID R6.1 U5.41
USBID/RB2: J14.7 J17.ID R18.1 U11.41
USBID/RB3: J20.7 J23.ID R26.1 U16.41
USBID/RB4: J26.7 J29.ID R34.1 U21.41
USBID/RB5: J2.7 J3.ID R9.1 U1.41
VCAP: C4.1 C5.1 U1.7
VCAP1: C1.1 C21.1 U5.7
VCAP2: C27.1 C34.1 U11.7
VCAP3: C40.1 C47.1 U16.7
VCAP4: C53.1 C60.1 U21.7

## Tracks (layer width: path | path; a pad name or v marks a point on that pad's centre or on a via)
3.3V  (via drill 0.3, 0.33)
  Top 0.178: 58.85,11 59.18,10.67 59.64,10.67 59.94,10.97 60.76,10.97 61.01,11.23 61.01,11.92 C10.1 | U1.28 50.19,15.95 v49.43,15.95 47.45,15.95 46.84,16.56 C9.1 | U1.17 57.45,15.29 57.45,16.1 v57.25,16.31 | U1.40 50.34,7.26 49.33,7.26 | 49.33,7.26 C8.1 | 49.33,7.26 48.11,7.26 47.9,7.47 v47.9,8.28 | ICSP.2 19.81,5.69 16.92,5.69 16.87,5.74 v16.87,9.35 | U2.8 39.78,10.62 39.88,10.62 39.96,10.7 U3.2 39.88,10.97 39.88,15.23 R1.1 39.84,15.27 v39.84,16.31 41.2,16.31 42.11,15.39 C14.2 42.3,14.41 42.32,14.43 43.87,14.43 U4.P4 | U6.14 6.57,17.46 6.2,17.83 v5.38,17.83 4.88,17.83 4.23,18.48 LED3.A
  Top 0.203: U1.10 58.85,11 | U1.40 | v59.89,11.99 60.97,11.99 C10.1 | R10.1 16.61,5.49 16.87,5.74 | C12.1 26.63,18.03 C6.1 25.3,17.98 v25.04,17.73
  Top 0.406: v71.98,9.35 71.98,6.86 J2.18
  Route15 0.178: 49.43,16.31 v39.84,16.31 31.44,16.31 30.02,17.73 v25.04,17.73 | 23.67,17.73 21.79,17.73 20.22,16.15 16.85,16.15 | 16.85,16.15 7.06,16.15 v5.38,17.83 | 16.85,16.15 16.85,9.36 v16.87,9.35 | v47.9,8.28 57.05,8.28 59.89,11.12 v59.89,11.99
  Route15 0.203: v25.04,17.73 23.67,17.73
  Route15 0.406: J1.3 72.54,17.68 67.06,17.68 64.11,14.73 64.11,12.95 v64.16,12.9 64.16,12.04 | 64.16,12.04 65.48,10.72 70.61,10.72 v71.98,9.35 | 64.16,12.04 59.94,12.04 | 59.94,12.04 v59.89,11.99 | 59.94,12.04 59.94,13.61 v57.25,16.31 49.43,16.31 v49.43,15.95
  pour Top: 64.06,13.36 63.7,13 63.7,11.07 67.31,11.07 67.31,12.04 66.95,12.4 66.14,12.4 65.89,12.65 65.89,12.95 65.48,13.36
3.3V1  (via drill 0.3, 0.33)
  Top 0.178: 58.85,29.9 59.18,29.57 59.64,29.57 59.94,29.87 60.76,29.87 61.01,30.12 61.01,30.82 C17.1 | U5.28 50.19,34.85 v49.43,34.85 47.45,34.85 46.84,35.46 C16.1 | U5.17 57.45,34.19 57.45,35 v57.25,35.2 | U5.40 50.34,26.16 49.33,26.16 | 49.33,26.16 C15.1 | 49.33,26.16 48.11,26.16 47.9,26.36 v47.9,27.18 | ICSP1.2 19.81,24.59 16.92,24.59 16.87,24.64 v16.87,28.25 | U7.8 39.78,29.52 39.88,29.52 39.96,29.6 U9.2 39.88,29.87 39.88,34.12 R13.1 39.84,34.17 v39.84,35.2 41.2,35.2 42.11,34.29 C20.2 42.3,33.31 42.32,33.33 43.87,33.33 U10.P4 | U8.14 6.57,36.35 6.2,36.73 v5.38,36.73 4.88,36.73 4.23,37.38 LED6.A
  Top 0.203: U5.10 58.85,29.9 | U5.40 | v59.89,30.89 60.97,30.89 C17.1 | R7.1 16.61,24.38 16.87,24.64 | C26.1 26.63,36.93 C25.1 25.3,36.88 v25.04,36.63
  Top 0.406: v71.98,28.25 71.98,25.76 J8.18
  Route15 0.178: 49.43,35.2 v39.84,35.2 31.44,35.2 30.02,36.63 v25.04,36.63 | 23.67,36.63 21.79,36.63 20.22,35.05 16.85,35.05 | 16.85,35.05 7.06,35.05 v5.38,36.73 | 16.85,35.05 16.85,28.26 v16.87,28.25 | v47.9,27.18 57.05,27.18 59.89,30.02 v59.89,30.89
  Route15 0.203: v25.04,36.63 23.67,36.63
  Route15 0.406: J4.3 72.54,36.58 67.06,36.58 64.11,33.63 64.11,31.85 v64.16,31.8 64.16,30.94 | 64.16,30.94 65.48,29.62 70.61,29.62 v71.98,28.25 | 64.16,30.94 59.94,30.94 | 59.94,30.94 v59.89,30.89 | 59.94,30.94 59.94,32.51 v57.25,35.2 49.43,35.2 v49.43,34.85
  pour Top: 64.06,32.26 63.7,31.9 63.7,29.97 67.31,29.97 67.31,30.94 66.95,31.29 66.14,31.29 65.89,31.55 65.89,31.85 65.48,32.26
3.3V2  (via drill 0.3, 0.33)
  Top 0.178: 58.85,48.79 59.18,48.46 59.64,48.46 59.94,48.77 60.76,48.77 61.01,49.02 61.01,49.72 C30.1 | U11.28 50.19,53.75 v49.43,53.75 47.45,53.75 46.84,54.36 C29.1 | U11.17 57.45,53.09 57.45,53.9 v57.25,54.1 | U11.40 50.34,45.06 49.33,45.06 | 49.33,45.06 C28.1 | 49.33,45.06 48.11,45.06 47.9,45.26 v47.9,46.08 | ICSP2.2 19.81,43.48 16.92,43.48 16.87,43.54 v16.87,47.14 | U12.8 39.78,48.41 39.88,48.41 39.96,48.5 U14.2 39.88,48.77 39.88,53.02 R21.1 39.84,53.06 v39.84,54.1 41.2,54.1 42.11,53.19 C33.2 42.3,52.21 42.32,52.22 43.87,52.22 U15.P4 | U13.14 6.57,55.25 6.2,55.63 v5.38,55.63 4.88,55.63 4.23,56.27 LED9.A
  Top 0.203: U11.10 58.85,48.79 | U11.40 | v59.89,49.78 60.97,49.78 C30.1 | R19.1 16.61,43.28 16.87,43.54 | C39.1 26.63,55.83 C38.1 25.3,55.78 v25.04,55.52
  Top 0.406: v71.98,47.14 71.98,44.65 J14.18
  Route15 0.178: 49.43,54.1 v39.84,54.1 31.44,54.1 30.02,55.52 v25.04,55.52 | 23.67,55.52 21.79,55.52 20.22,53.95 16.85,53.95 | 16.85,53.95 7.06,53.95 v5.38,55.63 | 16.85,53.95 16.85,47.16 v16.87,47.14 | v47.9,46.08 57.05,46.08 59.89,48.92 v59.89,49.78
  Route15 0.203: v25.04,55.52 23.67,55.52
  Route15 0.406: J13.3 72.54,55.47 67.06,55.47 64.11,52.53 64.11,50.75 v64.16,50.7 64.16,49.84 | 64.16,49.84 65.48,48.51 70.61,48.51 v71.98,47.14 | 64.16,49.84 59.94,49.84 | 59.94,49.84 v59.89,49.78 | 59.94,49.84 59.94,51.41 v57.25,54.1 49.43,54.1 v49.43,53.75
  pour Top: 64.06,51.16 63.7,50.8 63.7,48.87 67.31,48.87 67.31,49.83 66.95,50.19 66.14,50.19 65.89,50.44 65.89,50.75 65.48,51.16
3.3V3  (via drill 0.3, 0.33)
  Top 0.178: 58.85,67.69 59.18,67.36 59.64,67.36 59.94,67.67 60.76,67.67 61.01,67.92 61.01,68.62 C43.1 | U16.28 50.19,72.64 v49.43,72.64 47.45,72.64 46.84,73.25 C42.1 | U16.17 57.45,71.98 57.45,72.8 v57.25,73 | U16.40 50.34,63.96 49.33,63.96 | 49.33,63.96 C41.1 | 49.33,63.96 48.11,63.96 47.9,64.16 v47.9,64.97 | ICSP3.2 19.81,62.38 16.92,62.38 16.87,62.43 v16.87,66.04 | U17.8 39.78,67.31 39.88,67.31 39.96,67.4 U19.2 39.88,67.67 39.88,71.92 R29.1 39.84,71.96 v39.84,73 41.2,73 42.11,72.08 C46.2 42.3,71.11 42.32,71.12 43.87,71.12 U20.P4 | U18.14 6.57,74.15 6.2,74.52 v5.38,74.52 4.88,74.52 4.23,75.17 LED12.A
  Top 0.203: U16.10 58.85,67.69 | U16.40 | v59.89,68.68 60.97,68.68 C43.1 | R27.1 16.61,62.18 16.87,62.43 | C52.1 26.63,74.73 C51.1 25.3,74.68 v25.04,74.42
  Top 0.406: v71.98,66.04 71.98,63.55 J20.18
  Route15 0.178: 49.43,73 v39.84,73 31.44,73 30.02,74.42 v25.04,74.42 | 23.67,74.42 21.79,74.42 20.22,72.85 16.85,72.85 | 16.85,72.85 7.06,72.85 v5.38,74.52 | 16.85,72.85 16.85,66.06 v16.87,66.04 | v47.9,64.97 57.05,64.97 59.89,67.82 v59.89,68.68
  Route15 0.203: v25.04,74.42 23.67,74.42
  Route15 0.406: J19.3 72.54,74.37 67.06,74.37 64.11,71.42 64.11,69.65 v64.16,69.6 64.16,68.73 | 64.16,68.73 65.48,67.41 70.61,67.41 v71.98,66.04 | 64.16,68.73 59.94,68.73 | 59.94,68.73 v59.89,68.68 | 59.94,68.73 59.94,70.31 v57.25,73 49.43,73 v49.43,72.64
  pour Top: 64.06,70.05 63.7,69.7 63.7,67.77 67.31,67.77 67.31,68.73 66.95,69.09 66.14,69.09 65.89,69.34 65.89,69.65 65.48,70.05
3.3V4  (via drill 0.3, 0.33)
  Top 0.178: 58.85,86.59 59.18,86.26 59.64,86.26 59.94,86.56 60.76,86.56 61.01,86.82 61.01,87.52 C56.1 | U21.28 50.19,91.54 v49.43,91.54 47.45,91.54 46.84,92.15 C55.1 | U21.17 57.45,90.88 57.45,91.69 v57.25,91.9 | U21.40 50.34,82.86 49.33,82.86 | 49.33,82.86 C54.1 | 49.33,82.86 48.11,82.86 47.9,83.06 v47.9,83.87 | ICSP4.2 19.81,81.28 16.92,81.28 16.87,81.33 v16.87,84.94 | U22.8 39.78,86.21 39.88,86.21 39.96,86.29 U24.2 39.88,86.56 39.88,90.82 R37.1 39.84,90.86 v39.84,91.9 41.2,91.9 42.11,90.98 C59.2 42.3,90 42.32,90.02 43.87,90.02 U25.P4 | U23.14 6.57,93.05 6.2,93.42 v5.38,93.42 4.88,93.42 4.23,94.07 LED15.A
  Top 0.203: U21.10 58.85,86.59 | U21.40 | v59.89,87.58 60.97,87.58 C56.1 | R35.1 16.61,81.08 16.87,81.33 | C65.1 26.63,93.62 C64.1 25.3,93.57 v25.04,93.32
  Top 0.406: v71.98,84.94 71.98,82.45 J26.18
  Route15 0.178: 49.43,91.9 v39.84,91.9 31.44,91.9 30.02,93.32 v25.04,93.32 | 23.67,93.32 21.79,93.32 20.22,91.75 16.85,91.75 | 16.85,91.75 7.06,91.75 v5.38,93.42 | 16.85,91.75 16.85,84.95 v16.87,84.94 | v47.9,83.87 57.05,83.87 59.89,86.72 v59.89,87.58
  Route15 0.203: v25.04,93.32 23.67,93.32
  Route15 0.406: J25.3 72.54,93.27 67.06,93.27 64.11,90.32 64.11,88.54 v64.16,88.49 64.16,87.63 | 64.16,87.63 65.48,86.31 70.61,86.31 v71.98,84.94 | 64.16,87.63 59.94,87.63 | 59.94,87.63 v59.89,87.58 | 59.94,87.63 59.94,89.2 v57.25,91.9 49.43,91.9 v49.43,91.54
  pour Top: 64.06,88.95 63.7,88.6 63.7,86.66 67.31,86.66 67.31,87.63 66.95,87.99 66.14,87.99 65.89,88.24 65.89,88.54 65.48,88.95
5V  (via drill 0.3, 0.7, 0.9)
  Top 0.178: C7.2 35.76,10.36 v35.92,10.21 35.92,9.45 36.22,9.14 U2.1 | 52.7,7.8 v51.92,7.01
  Top 0.203: U1.42 52.7,7.8
  Top 0.406: C11.+ 80.67,13.1 v81.64,14.07 | J3.VBUS 83.69,7.23 v83.36,6.91
  Route15 0.178: v35.92,10.21 35.92,6.96 35.86,6.91 | v51.92,7.01 51.92,6.91
  Route15 0.254: 82.85,15.29 82.86,15.29
  Route15 0.406: 77.77,16.31 79.55,18.09 J1.1 | J2.20 79.55,6.91 | 80.82,13.16 80.82,13.26
  Route15 0.61: 80.82,13.26 77.77,16.31 v70.66,16.31
  Route15 1.27: 80.82,13.16 80.82,6.91 | 80.82,6.91 79.55,6.91 51.92,6.91 35.86,6.91 30.02,6.91 J7.4 28.75,8.23 28.4,8.59 19.85,8.59 J5.4 | 80.82,6.91 v83.36,6.91 | 80.82,13.26 v81.64,14.07 82.85,15.29 82.86,15.3 J6.2
  Bottom 0.406: J6.2 86.72,15.29
  Bottom 1.676: 86.72,15.29 88.59,15.29
  other vias: 69.95,12.85 68.48,16.81 68.48,12.85
  pour Top (rank 3): 65.63,12.04 70.66,12.04 70.66,13.11 72.75,15.19 75.74,15.19 75.79,15.24 75.79,17.63 65.58,17.63
  pour Bottom: 64.87,17.68 64.87,11.99 70.66,12.04 70.66,13.11 73.2,15.65 73.2,17.68
5V1  (via drill 0.3, 0.7, 0.9)
  Top 0.178: C22.2 35.76,29.26 v35.92,29.11 35.92,28.35 36.22,28.04 U7.1 | 52.7,26.69 v51.92,25.91
  Top 0.203: U5.42 52.7,26.69
  Top 0.406: C23.+ 80.67,32 v81.64,32.97 | J11.VBUS 83.69,26.13 v83.36,25.81
  Route15 0.178: v35.92,29.11 35.92,25.86 35.86,25.81 | v51.92,25.91 51.92,25.81
  Route15 0.254: 82.85,34.19 82.86,34.19
  Route15 0.406: 77.77,35.2 79.55,36.98 J4.1 | J8.20 79.55,25.81 | 80.82,32.05 80.82,32.16
  Route15 0.61: 80.82,32.16 77.77,35.2 v70.66,35.2
  Route15 1.27: 80.82,32.05 80.82,25.81 | 80.82,25.81 79.55,25.81 51.92,25.81 35.86,25.81 30.02,25.81 J10.4 28.75,27.13 28.4,27.48 19.85,27.48 J9.4 | 80.82,25.81 v83.36,25.81 | 80.82,32.16 v81.64,32.97 82.85,34.19 82.86,34.19 J12.2
  Bottom 0.406: J12.2 86.72,34.19
  Bottom 1.676: 86.72,34.19 88.59,34.19
  other vias: 69.95,31.75 68.48,35.71 68.48,31.75
  pour Top (rank 3): 65.63,30.94 70.66,30.94 70.66,32 72.75,34.09 75.74,34.09 75.79,34.14 75.79,36.53 65.58,36.53
  pour Bottom: 64.87,36.58 64.87,30.89 70.66,30.94 70.66,32 73.2,34.54 73.2,36.58
5V2  (via drill 0.3, 0.7, 0.9)
  Top 0.178: C35.2 35.76,48.16 v35.92,48.01 35.92,47.24 36.22,46.94 U12.1 | 52.7,45.59 v51.92,44.81
  Top 0.203: U11.42 52.7,45.59
  Top 0.406: C36.+ 80.67,50.9 v81.64,51.87 | J17.VBUS 83.69,45.03 v83.36,44.7
  Route15 0.178: v35.92,48.01 35.92,44.76 35.86,44.7 | v51.92,44.81 51.92,44.7
  Route15 0.254: 82.85,53.09 82.86,53.09
  Route15 0.406: 77.77,54.1 79.55,55.88 J13.1 | J14.20 79.55,44.7 | 80.82,50.95 80.82,51.05
  Route15 0.61: 80.82,51.05 77.77,54.1 v70.66,54.1
  Route15 1.27: 80.82,50.95 80.82,44.7 | 80.82,44.7 79.55,44.7 51.92,44.7 35.86,44.7 30.02,44.7 J16.4 28.75,46.02 28.4,46.38 19.85,46.38 J15.4 | 80.82,44.7 v83.36,44.7 | 80.82,51.05 v81.64,51.87 82.85,53.09 82.86,53.09 J18.2
  Bottom 0.406: J18.2 86.72,53.09
  Bottom 1.676: 86.72,53.09 88.59,53.09
  other vias: 69.95,50.65 68.48,54.61 68.48,50.65
  pour Top (rank 3): 65.63,49.83 70.66,49.83 70.66,50.9 72.75,52.98 75.74,52.98 75.79,53.04 75.79,55.42 65.58,55.42
  pour Bottom: 64.87,55.47 64.87,49.78 70.66,49.83 70.66,50.9 73.2,53.44 73.2,55.47
5V3  (via drill 0.3, 0.7, 0.9)
  Top 0.178: C48.2 35.76,67.06 v35.92,66.9 35.92,66.14 36.22,65.84 U17.1 | 52.7,64.49 v51.92,63.7
  Top 0.203: U16.42 52.7,64.49
  Top 0.406: C49.+ 80.67,69.8 v81.64,70.76 | J23.VBUS 83.69,63.93 v83.36,63.6
  Route15 0.178: v35.92,66.9 35.92,63.65 35.86,63.6 | v51.92,63.7 51.92,63.6
  Route15 0.254: 82.85,71.98 82.86,71.98
  Route15 0.406: 77.77,73 79.55,74.78 J19.1 | J20.20 79.55,63.6 | 80.82,69.85 80.82,69.95
  Route15 0.61: 80.82,69.95 77.77,73 v70.66,73
  Route15 1.27: 80.82,69.85 80.82,63.6 | 80.82,63.6 79.55,63.6 51.92,63.6 35.86,63.6 30.02,63.6 J22.4 28.75,64.92 28.4,65.28 19.85,65.28 J21.4 | 80.82,63.6 v83.36,63.6 | 80.82,69.95 v81.64,70.76 82.85,71.98 82.86,71.99 J24.2
  Bottom 0.406: J24.2 86.72,71.98
  Bottom 1.676: 86.72,71.98 88.59,71.98
  other vias: 69.95,69.55 68.48,73.51 68.48,69.55
  pour Top (rank 3): 65.63,68.73 70.66,68.73 70.66,69.8 72.75,71.88 75.74,71.88 75.79,71.93 75.79,74.32 65.58,74.32
  pour Bottom: 64.87,74.37 64.87,68.68 70.66,68.73 70.66,69.8 73.2,72.34 73.2,74.37
5V4  (via drill 0.3, 0.7, 0.9)
  Top 0.178: C61.2 35.76,85.95 v35.92,85.8 35.92,85.04 36.22,84.73 U22.1 | 52.7,83.39 v51.92,82.6
  Top 0.203: U21.42 52.7,83.39
  Top 0.406: C62.+ 80.67,88.69 v81.64,89.66 | J29.VBUS 83.69,82.83 v83.36,82.5
  Route15 0.178: v35.92,85.8 35.92,82.55 35.86,82.5 | v51.92,82.6 51.92,82.5
  Route15 0.254: 82.85,90.88 82.86,90.88
  Route15 0.406: 77.77,91.9 79.55,93.67 J25.1 | J26.20 79.55,82.5 | 80.82,88.75 80.82,88.85
  Route15 0.61: 80.82,88.85 77.77,91.9 v70.66,91.9
  Route15 1.27: 80.82,88.75 80.82,82.5 | 80.82,82.5 79.55,82.5 51.92,82.5 35.86,82.5 30.02,82.5 J28.4 28.75,83.82 28.4,84.18 19.85,84.18 J27.4 | 80.82,82.5 v83.36,82.5 | 80.82,88.85 v81.64,89.66 82.85,90.88 82.86,90.89 J30.2
  Bottom 0.406: J30.2 86.72,90.88
  Bottom 1.676: 86.72,90.88 88.59,90.88
  other vias: 69.95,88.44 68.48,92.41 68.48,88.44
  pour Top (rank 3): 65.63,87.63 70.66,87.63 70.66,88.7 72.75,90.78 75.74,90.78 75.79,90.83 75.79,93.22 65.58,93.22
  pour Bottom: 64.87,93.27 64.87,87.58 70.66,87.63 70.66,88.7 73.2,91.24 73.2,93.27
!MCLR!  (via drill 0.3)
  Top 0.178: v55.68,14.43 U1.18 | v70.92,8.18 70.92,5.38 J2.17 | v47.19,12.09 47.19,11.58 46.14,10.53 SW2.P4 SW2.P3
  Top 0.203: v55.68,14.43 | C2.2 R10.2 8.95,4.62 10.52,4.62 10.87,4.98 17.17,4.98 17.78,4.37 ICSP.1
  Bottom 0.178: v70.92,8.18 70.61,7.87 66.34,7.87 64.72,6.25 55.47,6.25 54.81,6.91 54.81,13.56 v55.68,14.43 54.61,15.49 51.41,15.49 48.01,12.09 v47.19,12.09 46.48,12.09 45.21,10.82 40.18,10.82 37.13,7.77 30.94,7.77 29.31,6.15 27.08,6.15 26.62,5.69 19.91,5.69 ICSP.1
!MCLR!1  (via drill 0.3)
  Top 0.178: v55.68,33.33 U5.18 | v70.92,27.08 70.92,24.28 J8.17 | v47.19,30.99 47.19,30.48 46.14,29.43 SW4.P4 SW4.P3
  Top 0.203: v55.68,33.33 | C24.2 R7.2 8.95,23.52 10.52,23.52 10.87,23.88 17.17,23.88 17.78,23.27 ICSP1.1
  Bottom 0.178: v70.92,27.08 70.61,26.77 66.34,26.77 64.72,25.15 55.47,25.15 54.81,25.81 54.81,32.46 v55.68,33.33 54.61,34.39 51.41,34.39 48.01,30.99 v47.19,30.99 46.48,30.99 45.21,29.72 40.18,29.72 37.13,26.67 30.94,26.67 29.31,25.04 27.08,25.04 26.62,24.59 19.91,24.59 ICSP1.1
!MCLR!2  (via drill 0.3)
  Top 0.178: v55.68,52.23 U11.18 | v70.92,45.97 70.92,43.18 J14.17 | v47.19,49.89 47.19,49.38 46.14,48.33 SW6.P4 SW6.P3
  Top 0.203: v55.68,52.22 v55.68,52.23 | C37.2 R19.2 8.95,42.42 10.52,42.42 10.87,42.77 17.17,42.77 17.78,42.16 ICSP2.1
  Bottom 0.178: v70.92,45.97 70.61,45.67 66.34,45.67 64.72,44.04 55.47,44.04 54.81,44.7 54.81,51.36 v55.68,52.22 54.61,53.29 51.41,53.29 48.01,49.89 v47.19,49.89 46.48,49.89 45.21,48.62 40.18,48.62 37.13,45.57 30.94,45.57 29.31,43.94 27.08,43.94 26.62,43.48 19.91,43.48 ICSP2.1
!MCLR!3  (via drill 0.3)
  Top 0.178: v55.68,71.12 U16.18 | v70.92,64.87 70.92,62.08 J20.17 | v47.19,68.78 47.19,68.28 46.14,67.23 SW8.P4 SW8.P3
  Top 0.203: v55.68,71.12 | C50.2 R27.2 8.95,61.32 10.52,61.32 10.87,61.67 17.17,61.67 17.78,61.06 ICSP3.1
  Bottom 0.178: v70.92,64.87 70.61,64.57 66.34,64.57 64.72,62.94 55.47,62.94 54.81,63.6 54.81,70.26 v55.68,71.12 54.61,72.19 51.41,72.19 48.01,68.78 v47.19,68.78 46.48,68.78 45.21,67.51 40.18,67.51 37.13,64.47 30.94,64.47 29.31,62.84 27.08,62.84 26.62,62.38 19.91,62.38 ICSP3.1
!MCLR!4  (via drill 0.3)
  Top 0.178: v55.68,90.02 U21.18 | v70.92,83.77 70.92,80.97 J26.17 | v47.19,87.68 47.19,87.17 46.14,86.12 SW10.P4 SW10.P3
  Top 0.203: v55.68,90.02 | C63.2 R35.2 8.95,80.21 10.52,80.21 10.87,80.57 17.17,80.57 17.78,79.96 ICSP4.1
  Bottom 0.178: v70.92,83.77 70.61,83.46 66.34,83.46 64.72,81.84 55.47,81.84 54.81,82.5 54.81,89.15 v55.68,90.02 54.61,91.08 51.41,91.08 48.01,87.68 v47.19,87.68 46.48,87.68 45.21,86.41 40.18,86.41 37.13,83.36 30.94,83.36 29.31,81.74 27.08,81.74 26.62,81.28 19.91,81.28 ICSP4.1
BT_MODE  (via drill 0.3)
  Top 0.178: v51.61,11.94 51.61,11.28 50.41,10.08 | J2.5 41.45,4.42 40.18,5.69 22.35,5.69 v21.13,6.91 | v4.17,17.58 U6.16
  Top 0.203: U1.37 50.41,10.08
  Bottom 0.178: J2.5 42.11,5.03 42.32,5.03 42.93,5.64 44.09,5.64 44.96,6.5 48.92,6.5 50.29,7.87 50.29,10.62 v51.61,11.94 | v21.13,6.91 21.13,7.62 19.66,9.09 18.29,9.09 17.12,10.26 17.12,12.45 12.5,17.07 4.67,17.07 v4.17,17.58
BT_MODE1  (via drill 0.3)
  Top 0.178: v51.61,30.84 51.61,30.18 50.41,28.98 | J8.5 41.45,23.32 40.18,24.59 22.35,24.59 v21.13,25.81 | v4.17,36.47 U8.16
  Top 0.203: U5.37 50.41,28.98
  Bottom 0.178: J8.5 42.11,23.93 42.32,23.93 42.93,24.54 44.09,24.54 44.96,25.4 48.92,25.4 50.29,26.77 50.29,29.52 v51.61,30.84 | v21.13,25.81 21.13,26.52 19.66,27.99 18.29,27.99 17.12,29.16 17.12,31.34 12.5,35.97 4.67,35.97 v4.17,36.47
BT_MODE2  (via drill 0.3)
  Top 0.178: v51.61,49.73 51.61,49.07 50.41,47.88 | J14.5 41.45,42.22 40.18,43.48 22.35,43.48 v21.13,44.7 | v4.17,55.37 U13.16
  Top 0.203: U11.37 50.41,47.88
  Bottom 0.178: J14.5 42.11,42.82 42.32,42.82 42.93,43.43 44.09,43.43 44.96,44.3 48.92,44.3 50.29,45.67 50.29,48.41 v51.61,49.73 | v21.13,44.7 21.13,45.41 19.66,46.89 18.29,46.89 17.12,48.06 17.12,50.24 12.5,54.86 4.67,54.86 v4.17,55.37
BT_MODE3  (via drill 0.3)
  Top 0.178: v51.61,68.63 51.61,67.97 50.41,66.77 | J20.5 41.45,61.11 40.18,62.38 22.35,62.38 v21.13,63.6 | v4.17,74.27 U18.16
  Top 0.203: U16.37 50.41,66.77
  Bottom 0.178: J20.5 42.11,61.72 42.32,61.72 42.93,62.33 44.09,62.33 44.96,63.2 48.92,63.2 50.29,64.57 50.29,67.31 v51.61,68.63 | v21.13,63.6 21.13,64.31 19.66,65.79 18.29,65.79 17.12,66.95 17.12,69.14 12.5,73.76 4.67,73.76 v4.17,74.27
BT_MODE4  (via drill 0.3)
  Top 0.178: v51.61,87.53 51.61,86.87 50.41,85.67 | J26.5 41.45,80.01 40.18,81.28 22.35,81.28 v21.13,82.5 | v4.17,93.17 U23.16
  Top 0.203: U21.37 50.41,85.67
  Bottom 0.178: J26.5 42.11,80.62 42.32,80.62 42.93,81.23 44.09,81.23 44.96,82.09 48.92,82.09 50.29,83.46 50.29,86.21 v51.61,87.53 | v21.13,82.5 21.13,83.21 19.66,84.68 18.29,84.68 17.12,85.85 17.12,88.04 12.5,92.66 4.67,92.66 v4.17,93.17
BT_RX  (via drill 0.3)
  Top 0.178: 54.71,6.85 54.68,6.83 | 54.68,6.83 54.15,6.3 J2.10 | U6.7 11.88,10.22 v13,9.09 | U1.1 54.68,6.83
  Top 0.203: 54.71,6.86 54.71,6.85
  Route15 0.178: J2.10 52.53,5.99 17.88,5.99 15.65,8.23 15.65,9.4 14.83,10.21 14.12,10.21 v13,9.09
BT_RX1  (via drill 0.3)
  Top 0.178: 54.71,25.75 54.68,25.73 | 54.68,25.73 54.15,25.2 J8.10 | U8.7 11.88,29.12 v13,27.99 | U5.1 54.68,25.73
  Top 0.203: 54.71,25.76 54.71,25.75
  Route15 0.178: J8.10 52.53,24.89 17.88,24.89 15.65,27.13 15.65,28.3 14.83,29.11 14.12,29.11 v13,27.99
BT_RX2  (via drill 0.3)
  Top 0.178: 54.71,44.65 54.68,44.62 | 54.68,44.62 54.15,44.09 J14.10 | U13.7 11.88,48.01 v13,46.89 | U11.1 54.68,44.62
  Top 0.203: 54.71,44.66 54.71,44.65
  Route15 0.178: J14.10 52.53,43.79 17.88,43.79 15.65,46.02 15.65,47.19 14.83,48.01 14.12,48.01 v13,46.89
BT_RX3  (via drill 0.3)
  Top 0.178: 54.71,63.55 54.68,63.52 | 54.68,63.52 54.15,62.99 J20.10 | U18.7 11.88,66.91 v13,65.79 | U16.1 54.68,63.52
  Top 0.203: 54.71,63.55
  Route15 0.178: J20.10 52.53,62.69 17.88,62.69 15.65,64.92 15.65,66.09 14.83,66.9 14.12,66.9 v13,65.79
BT_RX4  (via drill 0.3)
  Top 0.178: 54.71,82.44 54.68,82.42 | 54.68,82.42 54.15,81.89 J26.10 | U23.7 11.88,85.81 v13,84.68 | U21.1 54.68,82.42
  Top 0.203: 54.71,82.45 54.71,82.44
  Route15 0.178: J26.10 52.53,81.58 17.88,81.58 15.65,83.82 15.65,84.99 14.83,85.8 14.12,85.8 v13,84.68
BT_TX  (via drill 0.3)
  Top 0.178: 53.51,6.78 53.24,6.5 53.24,5.99 J2.9 | U6.8 12.1,11.42 v14.53,8.99 | 53.62,6.78 U1.44
  Top 0.203: 53.62,6.78 53.51,6.78
  Route15 0.178: J2.9 50.39,5.59 17.37,5.59 14.53,8.43 v14.53,8.99
BT_TX1  (via drill 0.3)
  Top 0.178: 53.51,25.68 53.24,25.4 53.24,24.89 J8.9 | U8.8 12.1,30.32 v14.53,27.89 | 53.62,25.68 U5.44
  Top 0.203: 53.62,25.68 53.51,25.68
  Route15 0.178: J8.9 50.39,24.49 17.37,24.49 14.53,27.33 v14.53,27.89
BT_TX2  (via drill 0.3)
  Top 0.178: 53.51,44.57 53.24,44.3 53.24,43.79 J14.9 | U13.8 12.1,49.21 v14.53,46.79 | 53.62,44.57 U11.44
  Top 0.203: 53.62,44.57 53.51,44.57
  Route15 0.178: J14.9 50.39,43.38 17.37,43.38 14.53,46.23 v14.53,46.79
BT_TX3  (via drill 0.3)
  Top 0.178: 53.51,63.47 53.24,63.2 53.24,62.69 J20.9 | U18.8 12.1,68.11 v14.53,65.68 | 53.62,63.47 U16.44
  Top 0.203: 53.62,63.47 53.51,63.47
  Route15 0.178: J20.9 50.39,62.28 17.37,62.28 14.53,65.13 v14.53,65.68
BT_TX4  (via drill 0.3)
  Top 0.178: 53.51,82.37 53.24,82.09 53.24,81.58 J26.9 | U23.8 12.1,87.01 v14.53,84.58 | 53.62,82.37 U21.44
  Top 0.203: 53.62,82.37 53.51,82.37
  Route15 0.178: J26.9 50.39,81.18 17.37,81.18 14.53,84.02 v14.53,84.58
D+/RB1  (via drill 0.3)
  Top 0.178: 57.9,28.97 58.57,28.3 60.5,28.3 v60.71,28.09 | J11.D+ 83.72,27.43 v83.62,27.53 | v68.48,27.94 68.48,24.89 J8.15
  Top 0.203: U5.8 57.9,28.97
  Bottom 0.178: v60.71,28.09 60.96,28.35 68.07,28.35 v68.48,27.94 | v83.62,27.53 83.31,27.84 82.35,27.84 80.21,25.7 69.29,25.7 J8.15
D+/RB2  (via drill 0.3)
  Top 0.178: U11.8 58.57,47.19 60.5,47.19 v60.71,46.99 | J17.D+ 83.72,46.33 v83.62,46.43 | v68.48,46.84 68.48,43.79 J14.15
  Top 0.203: U11.8
  Bottom 0.178: v60.71,46.99 60.96,47.24 68.07,47.24 v68.48,46.84 | v83.62,46.43 83.31,46.74 82.35,46.74 80.21,44.6 69.29,44.6 J14.15
D+/RB3  (via drill 0.3)
  Top 0.178: U16.8 58.57,66.09 60.5,66.09 v60.71,65.89 | J23.D+ 83.72,65.23 v83.62,65.33 | v68.48,65.73 68.48,62.69 J20.15
  Top 0.203: U16.8
  Bottom 0.178: v60.71,65.89 60.96,66.14 68.07,66.14 v68.48,65.73 | v83.62,65.33 83.31,65.63 82.35,65.63 80.21,63.5 69.29,63.5 J20.15
D+/RB4  (via drill 0.3)
  Top 0.178: U21.8 58.57,84.99 60.5,84.99 v60.71,84.78 | J29.D+ 83.72,84.12 v83.62,84.23 | v68.48,84.63 68.48,81.58 J26.15
  Top 0.203: U21.8
  Bottom 0.178: v60.71,84.78 60.96,85.04 68.07,85.04 v68.48,84.63 | v83.62,84.23 83.31,84.53 82.35,84.53 80.21,82.4 69.29,82.4 J26.15
D+/RB10  (via drill 0.3)
  Top 0.178: U1.8 58.57,9.4 60.5,9.4 v60.71,9.2 | J3.D+ 83.72,8.53 v83.62,8.64 | v68.48,9.04 68.48,5.99 J2.15
  Top 0.203: U1.8
  Bottom 0.178: v60.71,9.2 60.96,9.45 68.07,9.45 v68.48,9.04 | v83.62,8.64 83.31,8.94 82.35,8.94 80.21,6.81 69.29,6.81 J2.15
D-/RB1  (via drill 0.3)
  Top 0.178: 58.4,29.44 58.78,29.06 v60.4,29.06 | J11.D- 83.05,26.78 v82.7,27.13 | v68.48,28.8 69.39,27.89 J8.16
  Top 0.203: U5.9 58.4,29.44
  Bottom 0.178: v60.4,29.06 60.65,28.8 v68.48,28.8 | v82.7,27.13 80.87,25.3 71.42,25.3 J8.16
D-/RB2  (via drill 0.3)
  Top 0.178: 58.4,48.33 58.78,47.95 v60.4,47.95 | J17.D- 83.05,45.68 v82.7,46.02 | v68.48,47.7 69.39,46.79 J14.16
  Top 0.203: U11.9 58.4,48.33
  Bottom 0.178: v60.4,47.95 60.65,47.7 v68.48,47.7 | v82.7,46.02 80.87,44.2 71.42,44.2 J14.16
D-/RB3  (via drill 0.3)
  Top 0.178: 58.4,67.23 58.78,66.85 v60.4,66.85 | J23.D- 83.05,64.58 v82.7,64.92 | v68.48,66.6 69.39,65.68 J20.16
  Top 0.203: U16.9 58.4,67.23
  Bottom 0.178: v60.4,66.85 60.65,66.6 v68.48,66.6 | v82.7,64.92 80.87,63.09 71.42,63.09 J20.16
D-/RB4  (via drill 0.3)
  Top 0.178: 58.4,86.13 58.78,85.75 v60.4,85.75 | J29.D- 83.05,83.47 v82.7,83.82 | v68.48,85.5 69.39,84.58 J26.16
  Top 0.203: U21.9 58.4,86.13
  Bottom 0.178: v60.4,85.75 60.65,85.5 v68.48,85.5 | v82.7,83.82 80.87,81.99 71.42,81.99 J26.16
D-/RB11  (via drill 0.3)
  Top 0.178: 58.4,10.54 58.78,10.16 v60.4,10.16 | J3.D- 83.05,7.88 v82.7,8.23 | v68.48,9.91 69.39,8.99 J2.16
  Top 0.203: U1.9 58.4,10.54
  Bottom 0.178: v60.4,10.16 60.65,9.91 v68.48,9.91 | v82.7,8.23 80.87,6.4 71.42,6.4 J2.16
GND  (via drill 0.3)
  Top 0.178: J3.GND 84.4,9.83
  Top 0.406: 84.4,9.83 83.62,10.62
  Bottom 0.406: J6.1 86.82,18.8
  Bottom 1.676: 86.82,18.8 88.59,18.8
  other vias: 56.13,10.06 56.44,13.72 52.32,9.8 51.66,13.51 62.69,10.97 63.35,8.59 73.86,9.09 83.21,11.18 71.93,11.02 68.73,11.38 64.06,15.95 62.84,13.11 8.94,11.38 8.13,17.78 8.13,20.02 3.91,6.45 4.27,11.13 40.18,17.27 45.01,8.18 36.98,11.99 55.52,12.34 24.99,7.26 41.05,11.68 45.01,11.68 29.67,18.8
  pour Top (isolate 0.254, rank 6): 3.35,20.88 3.35,3.1 89.71,3.1 89.71,20.88
  pour Route2: 3.35,20.88 89.71,20.88 89.71,3.1 3.35,3.1
  pour Route15: 3.35,20.88 89.71,20.88 89.71,3.1 3.35,3.1
  pour Bottom (isolate 0.254, rank 3): 3.35,3.1 3.35,20.88 89.71,20.88 89.71,3.1
GND1  (via drill 0.3)
  Top 0.178: J11.GND 84.4,28.73
  Top 0.406: 84.4,28.73 83.62,29.52
  Bottom 0.406: J12.1 86.82,37.69
  Bottom 1.676: 86.82,37.69 88.59,37.69
  other vias: 56.13,28.96 56.44,32.61 52.32,28.7 51.66,32.41 62.69,29.87 63.35,27.48 73.86,27.99 83.21,30.07 71.93,29.92 68.73,30.28 64.06,34.85 62.84,32 8.94,30.28 8.13,36.68 8.13,38.91 3.91,25.35 4.27,30.02 40.18,36.17 45.01,27.08 36.98,30.89 55.52,31.24 24.99,26.16 41.05,30.58 45.01,30.58 29.67,37.69
  pour Top (isolate 0.254, rank 6): 3.35,39.78 3.35,22 89.71,22 89.71,39.78
  pour Route2: 3.35,39.78 89.71,39.78 89.71,22 3.35,22
  pour Route15: 3.35,39.78 89.71,39.78 89.71,22 3.35,22
  pour Bottom (isolate 0.254, rank 3): 3.35,22 3.35,39.78 89.71,39.78 89.71,22
GND2  (via drill 0.3)
  Top 0.178: J17.GND 84.4,47.63
  Top 0.406: 84.4,47.63 83.62,48.41
  Bottom 0.406: J18.1 86.82,56.59
  Bottom 1.676: 86.82,56.59 88.59,56.59
  other vias: 56.13,47.85 56.44,51.51 52.32,47.6 51.66,51.31 62.69,48.77 63.35,46.38 73.86,46.89 83.21,48.97 71.93,48.82 68.73,49.17 64.06,53.75 62.84,50.9 8.94,49.17 8.13,55.58 8.13,57.81 3.91,44.25 4.27,48.92 40.18,55.07 45.01,45.97 36.98,49.78 55.52,50.14 24.99,45.06 41.05,49.48 45.01,49.48 29.67,56.59
  pour Top (isolate 0.254, rank 6): 3.35,58.67 3.35,40.89 89.71,40.89 89.71,58.67
  pour Route2: 3.35,58.67 89.71,58.67 89.71,40.89 3.35,40.89
  pour Route15: 3.35,58.67 89.71,58.67 89.71,40.89 3.35,40.89
  pour Bottom (isolate 0.254, rank 3): 3.35,40.89 3.35,58.67 89.71,58.67 89.71,40.89
GND3  (via drill 0.3)
  Top 0.178: J23.GND 84.4,66.53
  Top 0.406: 84.4,66.53 83.62,67.31
  Bottom 0.406: J24.1 86.82,75.49
  Bottom 1.676: 86.82,75.49 88.59,75.49
  other vias: 56.13,66.75 56.44,70.41 52.32,66.5 51.66,70.21 62.69,67.67 63.35,65.28 73.86,65.79 83.21,67.87 71.93,67.72 68.73,68.07 64.06,72.64 62.84,69.8 8.94,68.07 8.13,74.47 8.13,76.71 3.91,63.14 4.27,67.82 40.18,73.96 45.01,64.87 36.98,68.68 55.52,69.04 24.99,63.96 41.05,68.38 45.01,68.38 29.67,75.49
  pour Top (isolate 0.254, rank 6): 3.35,77.57 3.35,59.79 89.71,59.79 89.71,77.57
  pour Route2: 3.35,77.57 89.71,77.57 89.71,59.79 3.35,59.79
  pour Route15: 3.35,77.57 89.71,77.57 89.71,59.79 3.35,59.79
  pour Bottom (isolate 0.254, rank 3): 3.35,59.79 3.35,77.57 89.71,77.57 89.71,59.79
GND4  (via drill 0.3)
  Top 0.178: J29.GND 84.4,85.42
  Top 0.406: 84.4,85.42 83.62,86.21
  Bottom 0.406: J30.1 86.82,94.39
  Bottom 1.676: 86.82,94.39 88.59,94.39
  other vias: 56.13,85.65 56.44,89.31 52.32,85.39 51.66,89.1 62.69,86.56 63.35,84.18 73.86,84.68 83.21,86.77 71.93,86.61 68.73,86.97 64.06,91.54 62.84,88.7 8.94,86.97 8.13,93.37 8.13,95.61 3.91,82.04 4.27,86.72 40.18,92.86 45.01,83.77 36.98,87.58 55.52,87.93 24.99,82.85 41.05,87.27 45.01,87.27 29.67,94.39
  pour Top (isolate 0.254, rank 6): 3.35,96.47 3.35,78.69 89.71,78.69 89.71,96.47
  pour Route2: 3.35,96.47 89.71,96.47 89.71,78.69 3.35,78.69
  pour Route15: 3.35,96.47 89.71,96.47 89.71,78.69 3.35,78.69
  pour Bottom (isolate 0.254, rank 3): 3.35,78.69 3.35,96.47 89.71,96.47 89.71,78.69
LED_CLOCK  (via drill 0.3)
  Top 0.178: v59.38,16.76 59.18,16.56 59.18,14.28 58.36,13.45 U1.14 58.35,13.44 57.91,13.01 57.91,12.75 55.88,10.72 v54,10.72 | U2.6 41.1,8.13 41.4,8.43 43.13,8.43 v43.33,8.23
  Route15 0.178: v54,10.72 53.75,10.46 51.05,10.46 49.78,9.2 44.3,9.2 v43.33,8.23
  Bottom 0.178: v59.38,16.76 60.35,17.73 62.43,17.73 J1.7
LED_CLOCK1  (via drill 0.3)